# Altium PCB ebit_ad.PcbDoc (part 1 of 6)
Units mil, origin at the board's own origin, x right, y up, seen from the top; angles counter-clockwise.
Board outline 3958.82 x 3829.88 mil, 4 copper layers (Top Layer, MidLayer1, MidLayer2, Bottom Layer); 565 components, 392 nets, 1912 pads, 1242 vias.
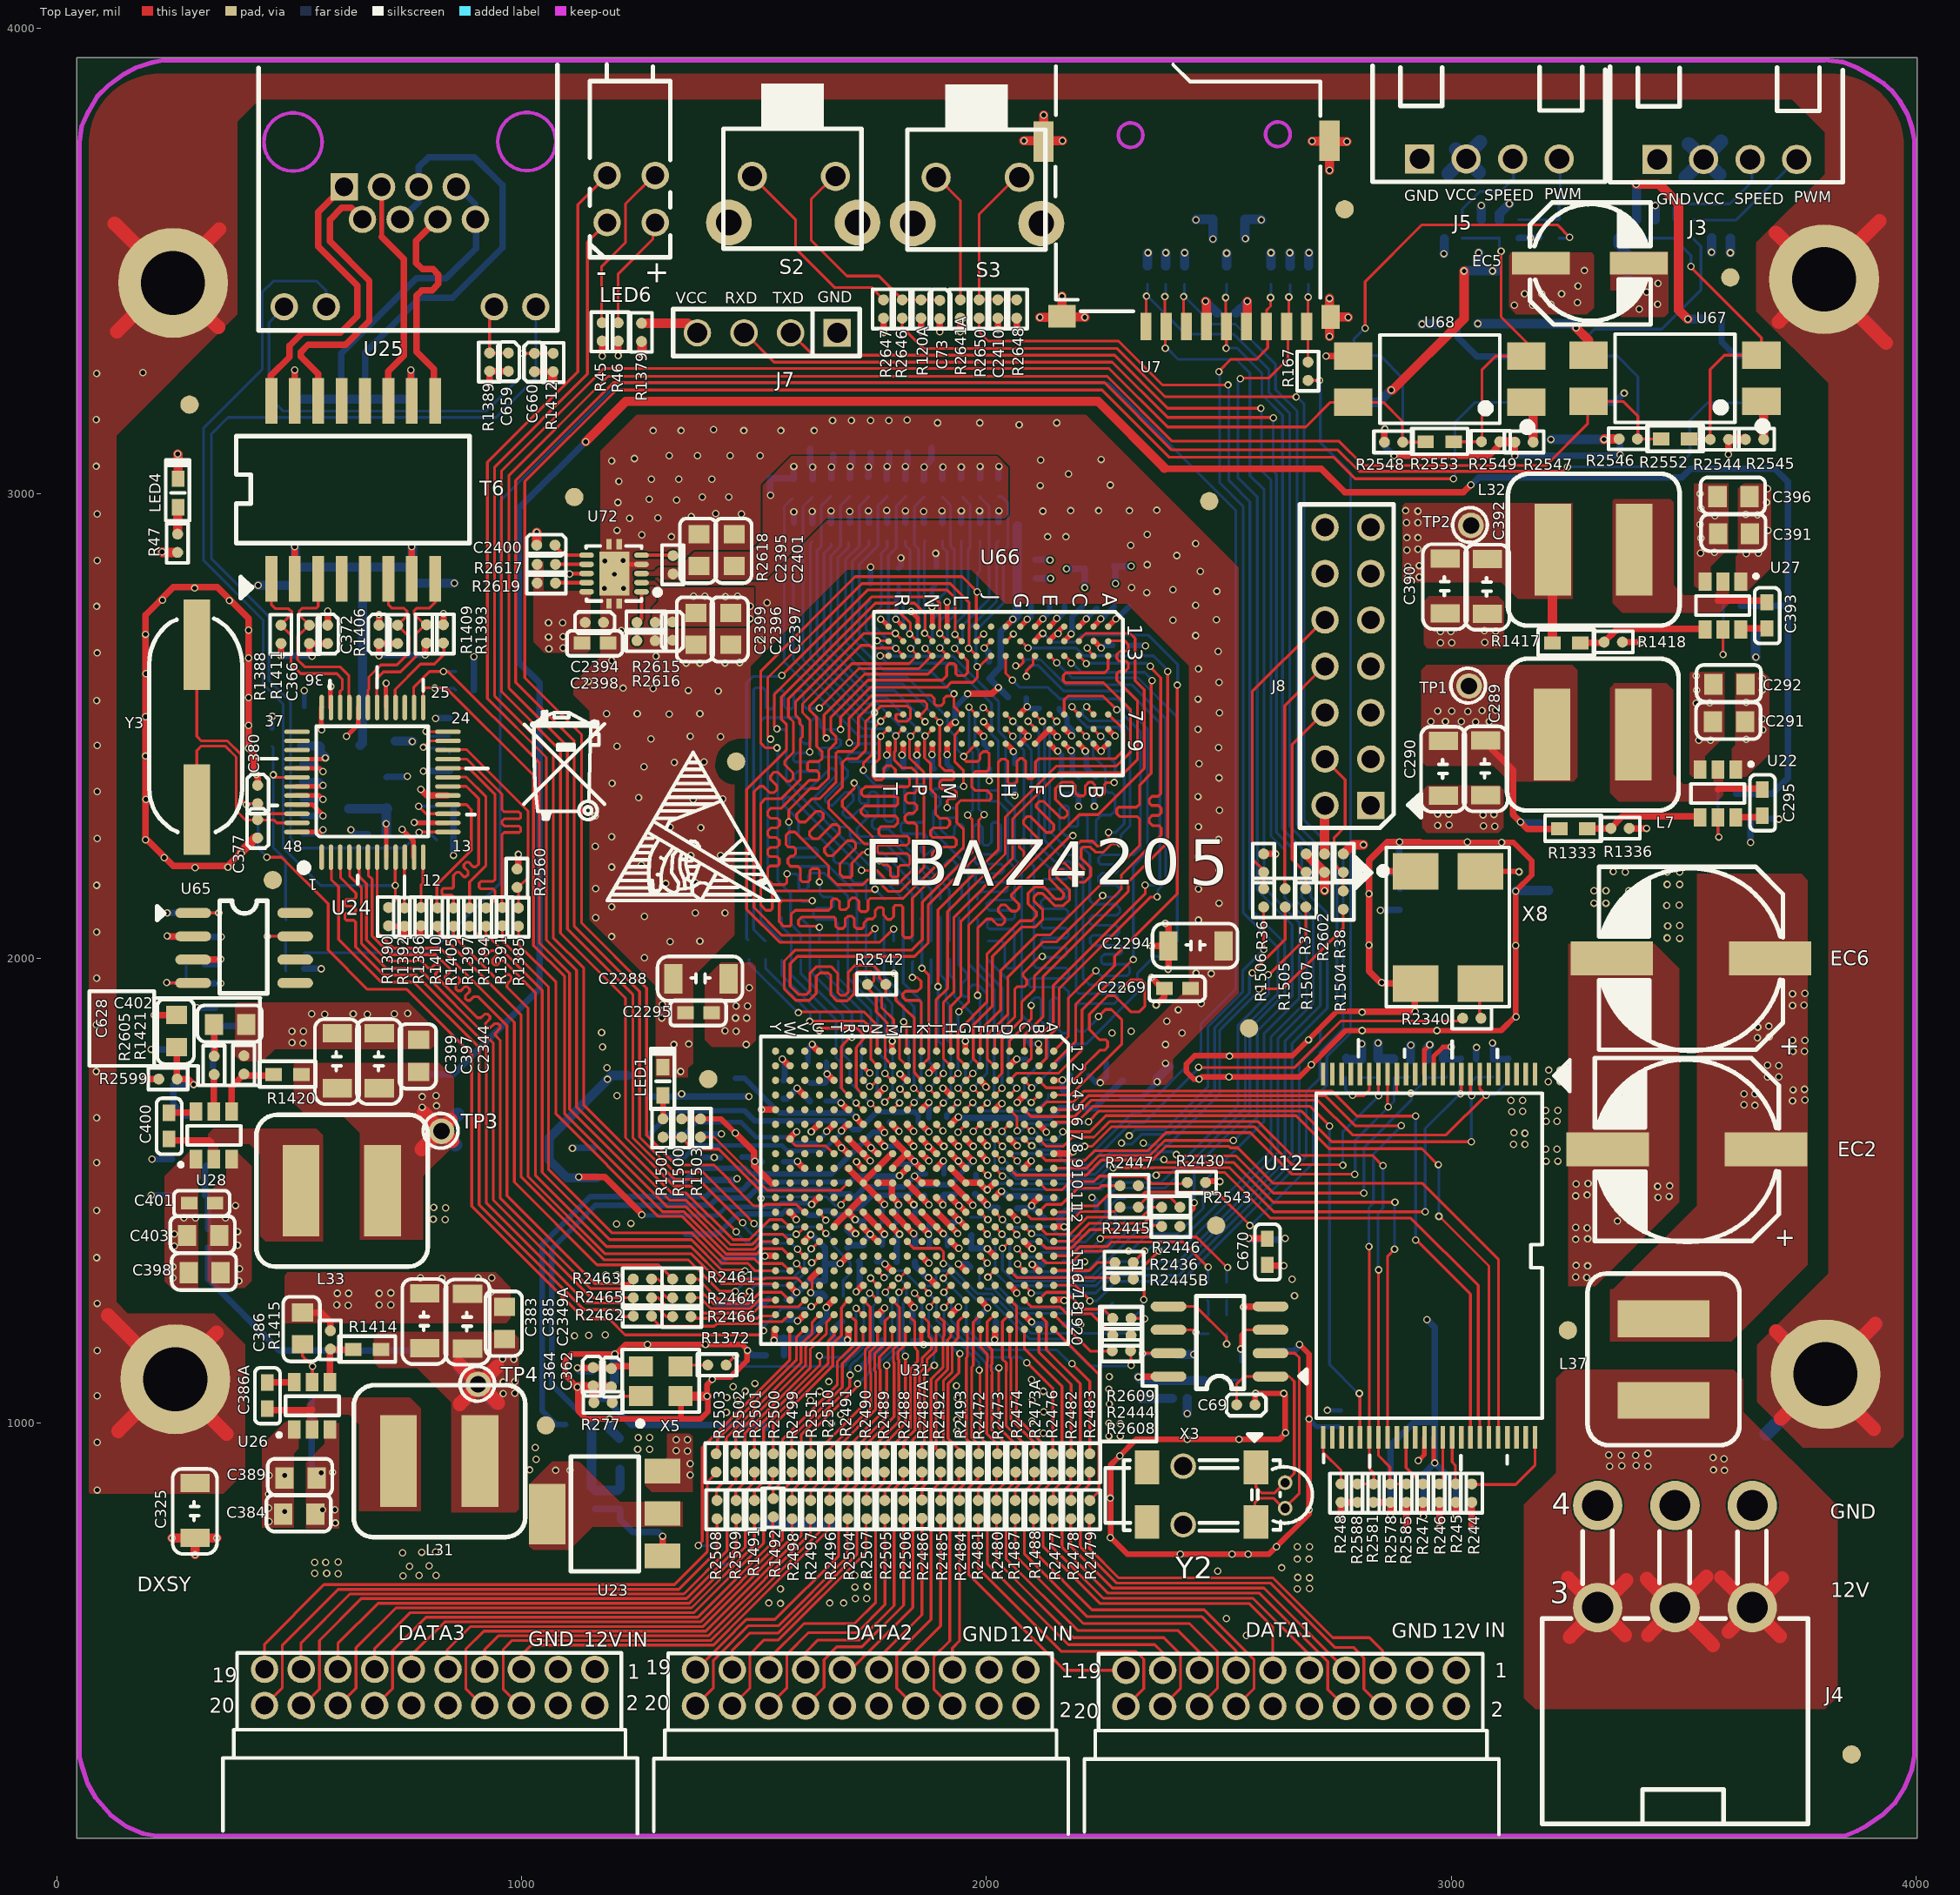
[diagram p0: Top Layer view]
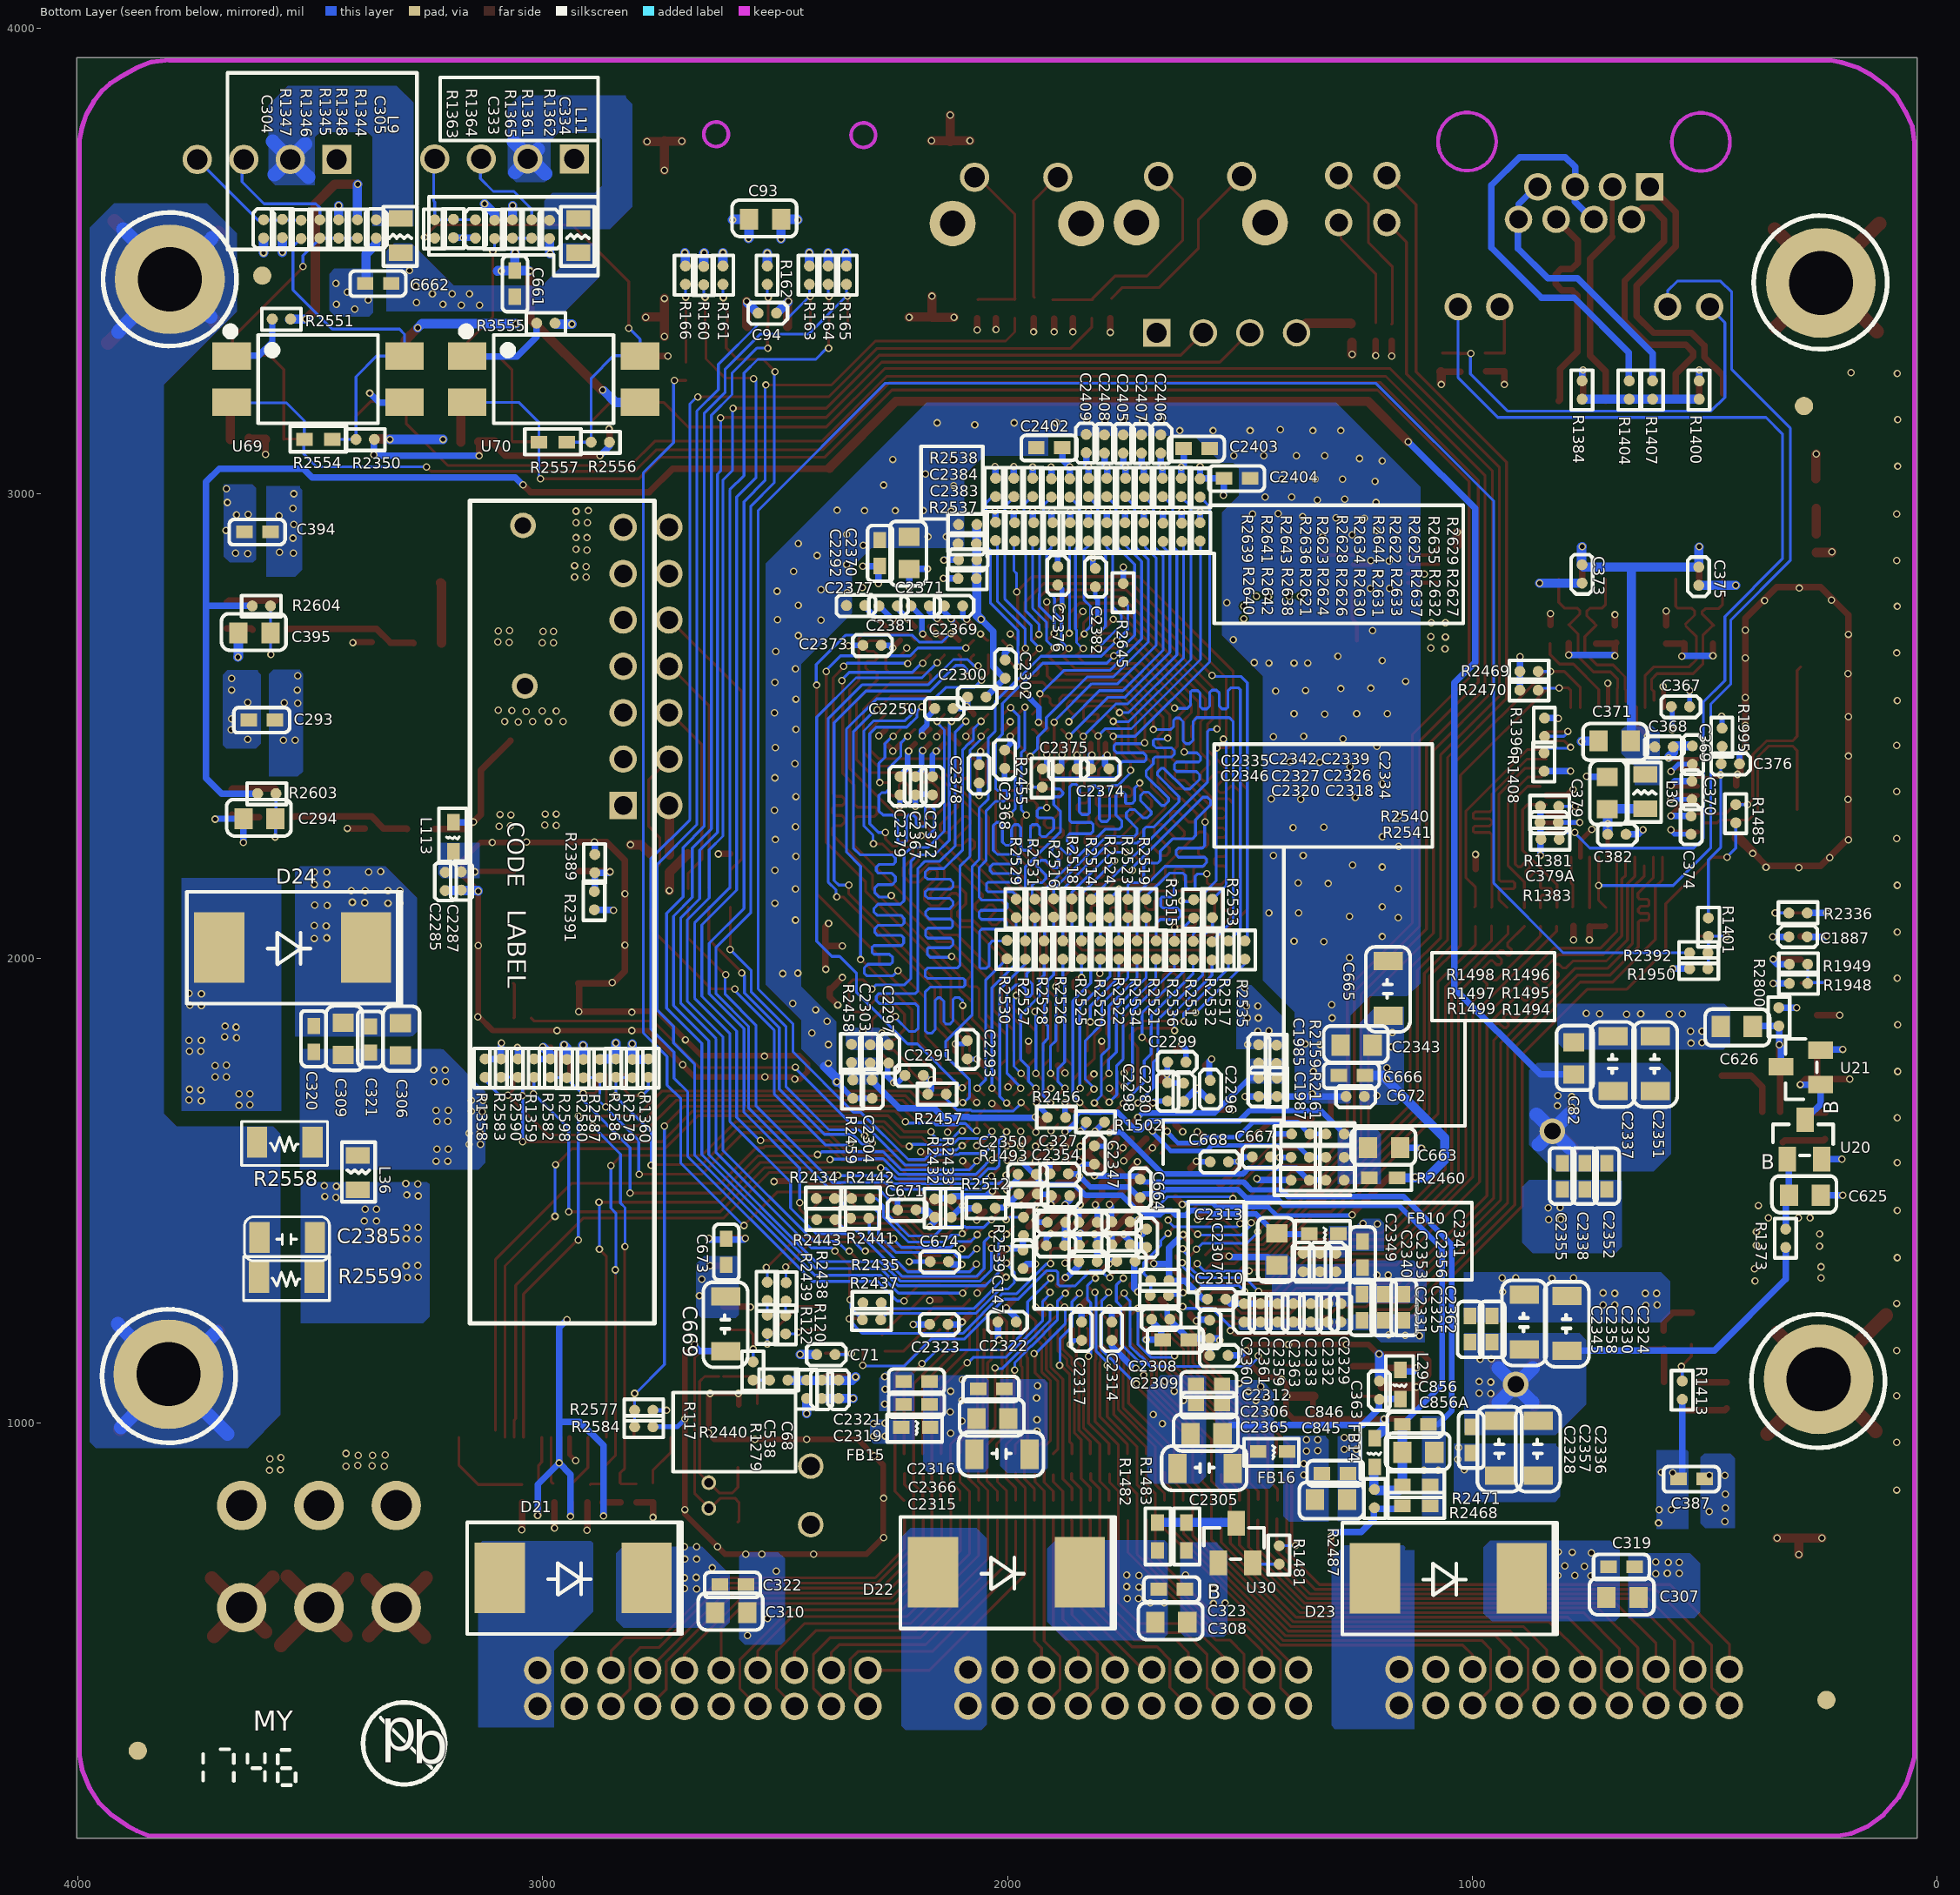
[diagram p1: Bottom Layer view, seen from below]
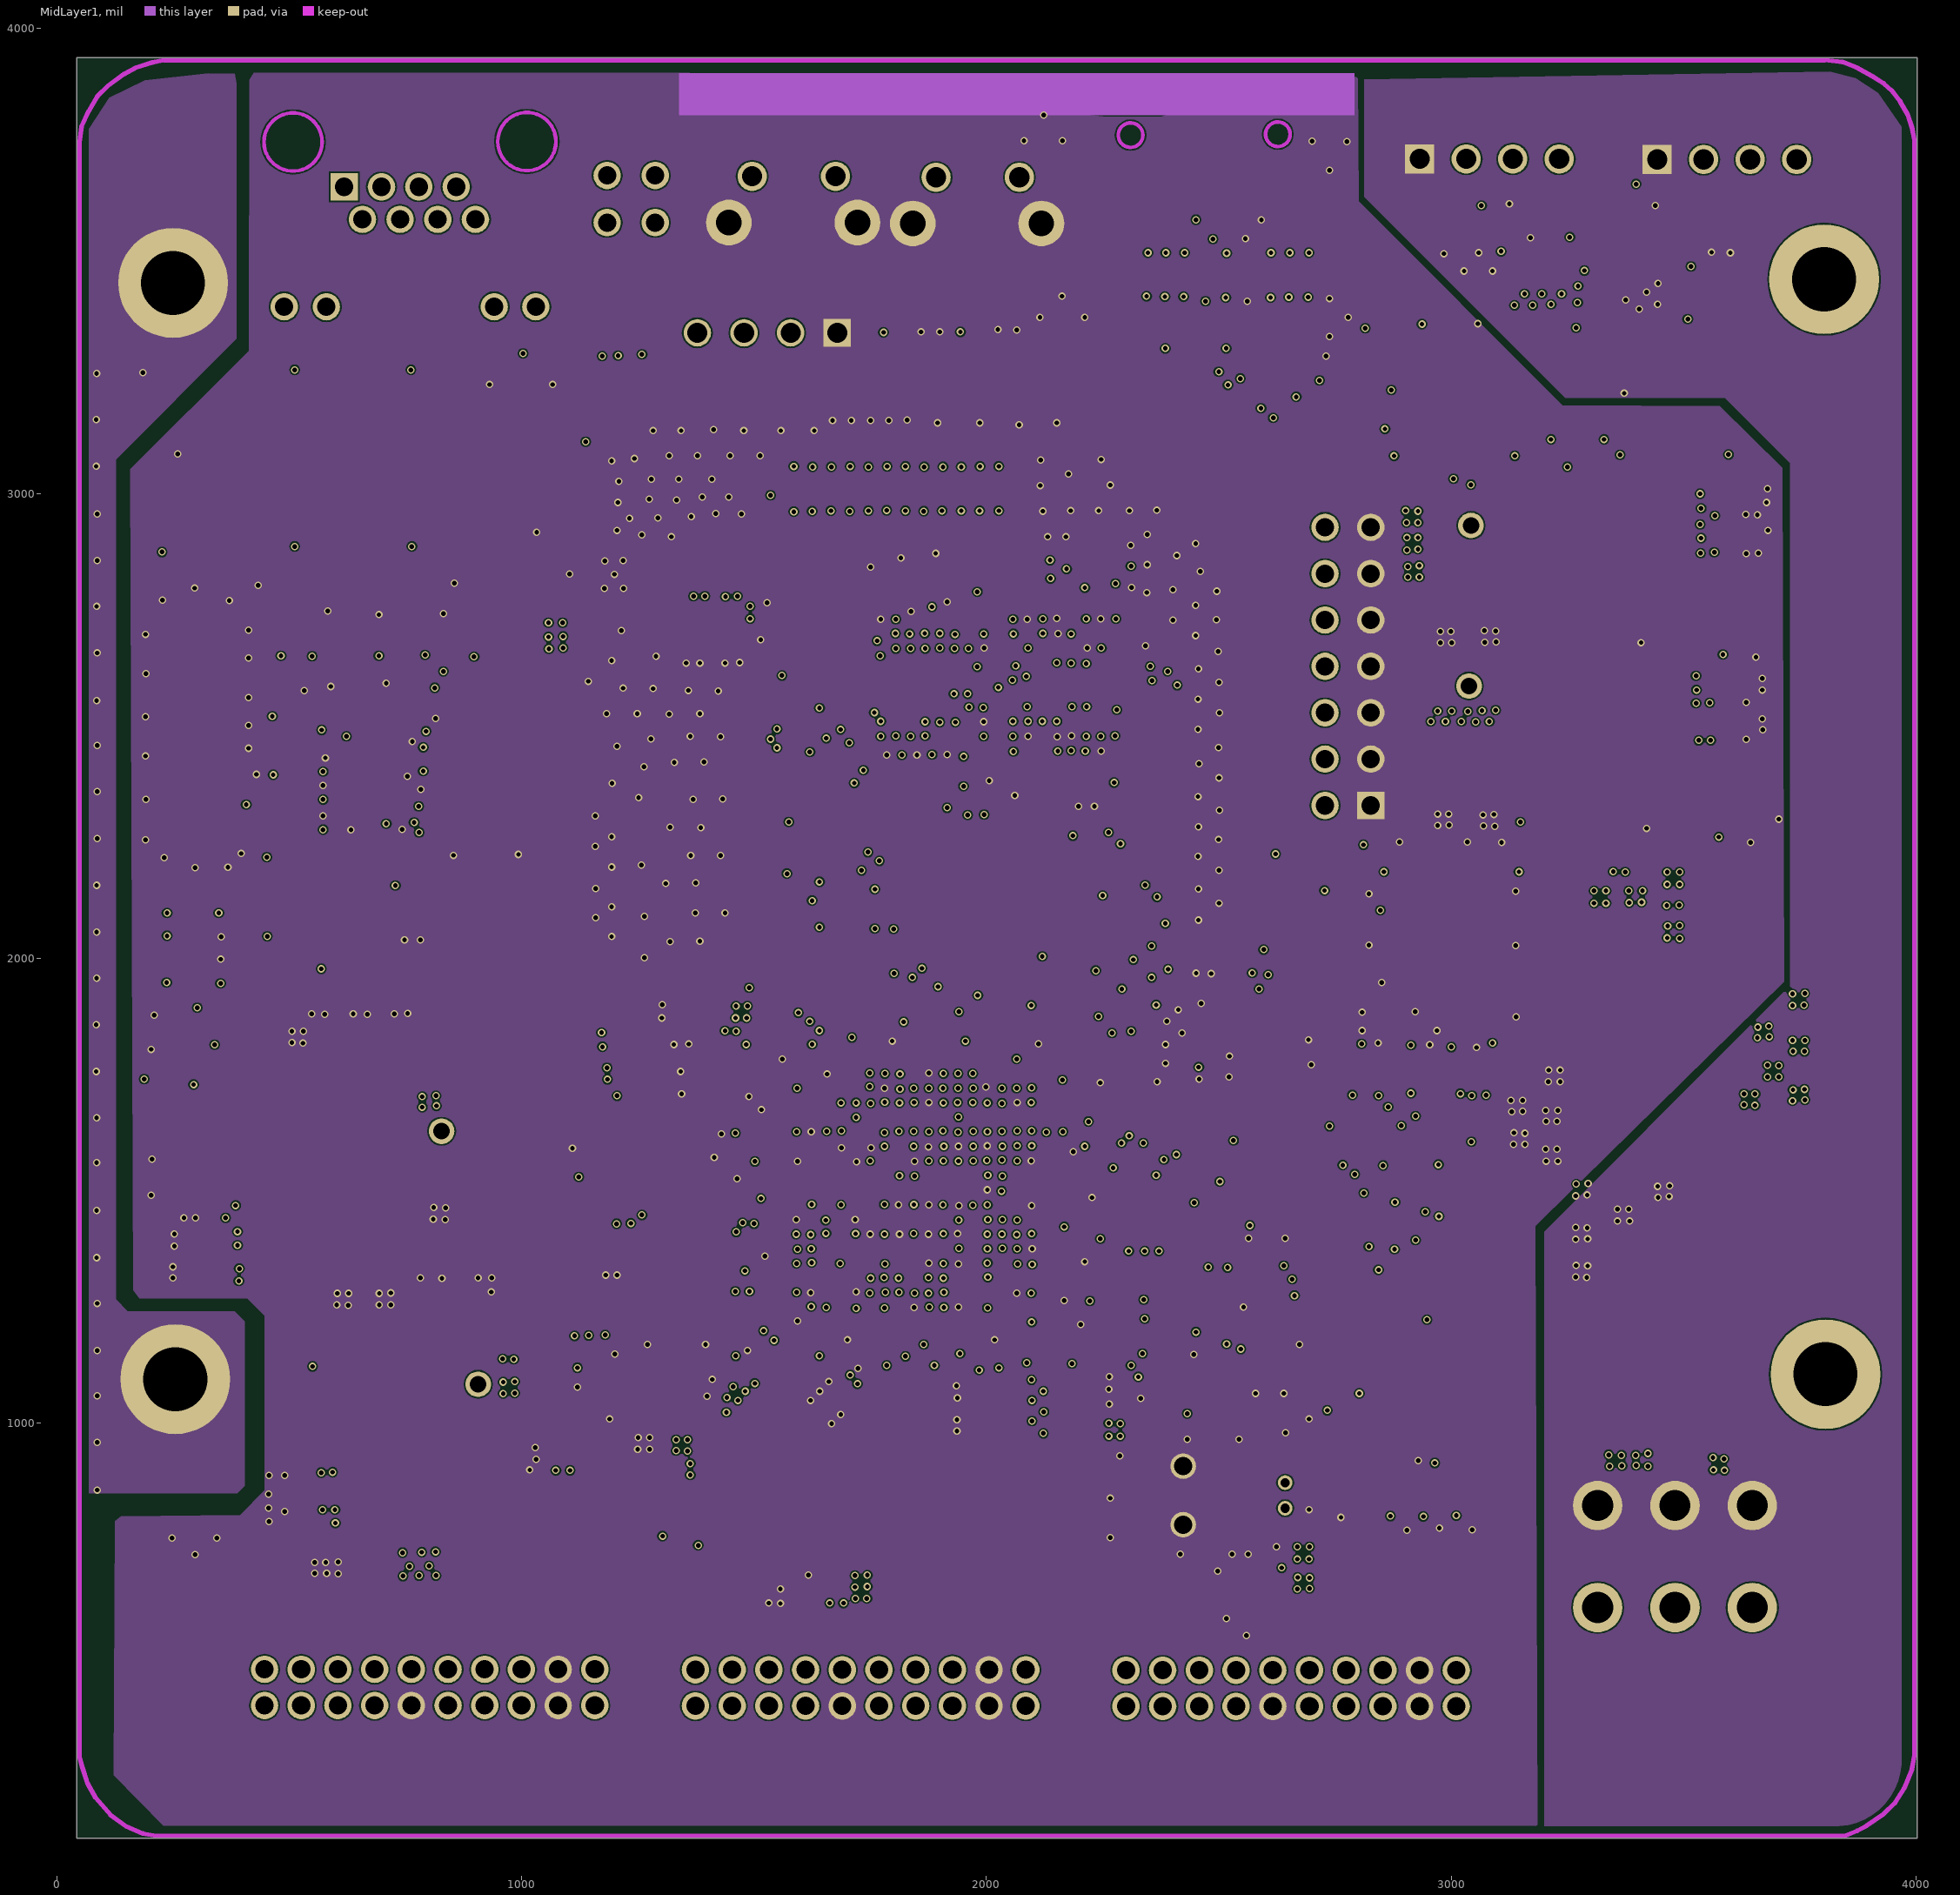
[diagram p2: MidLayer1]
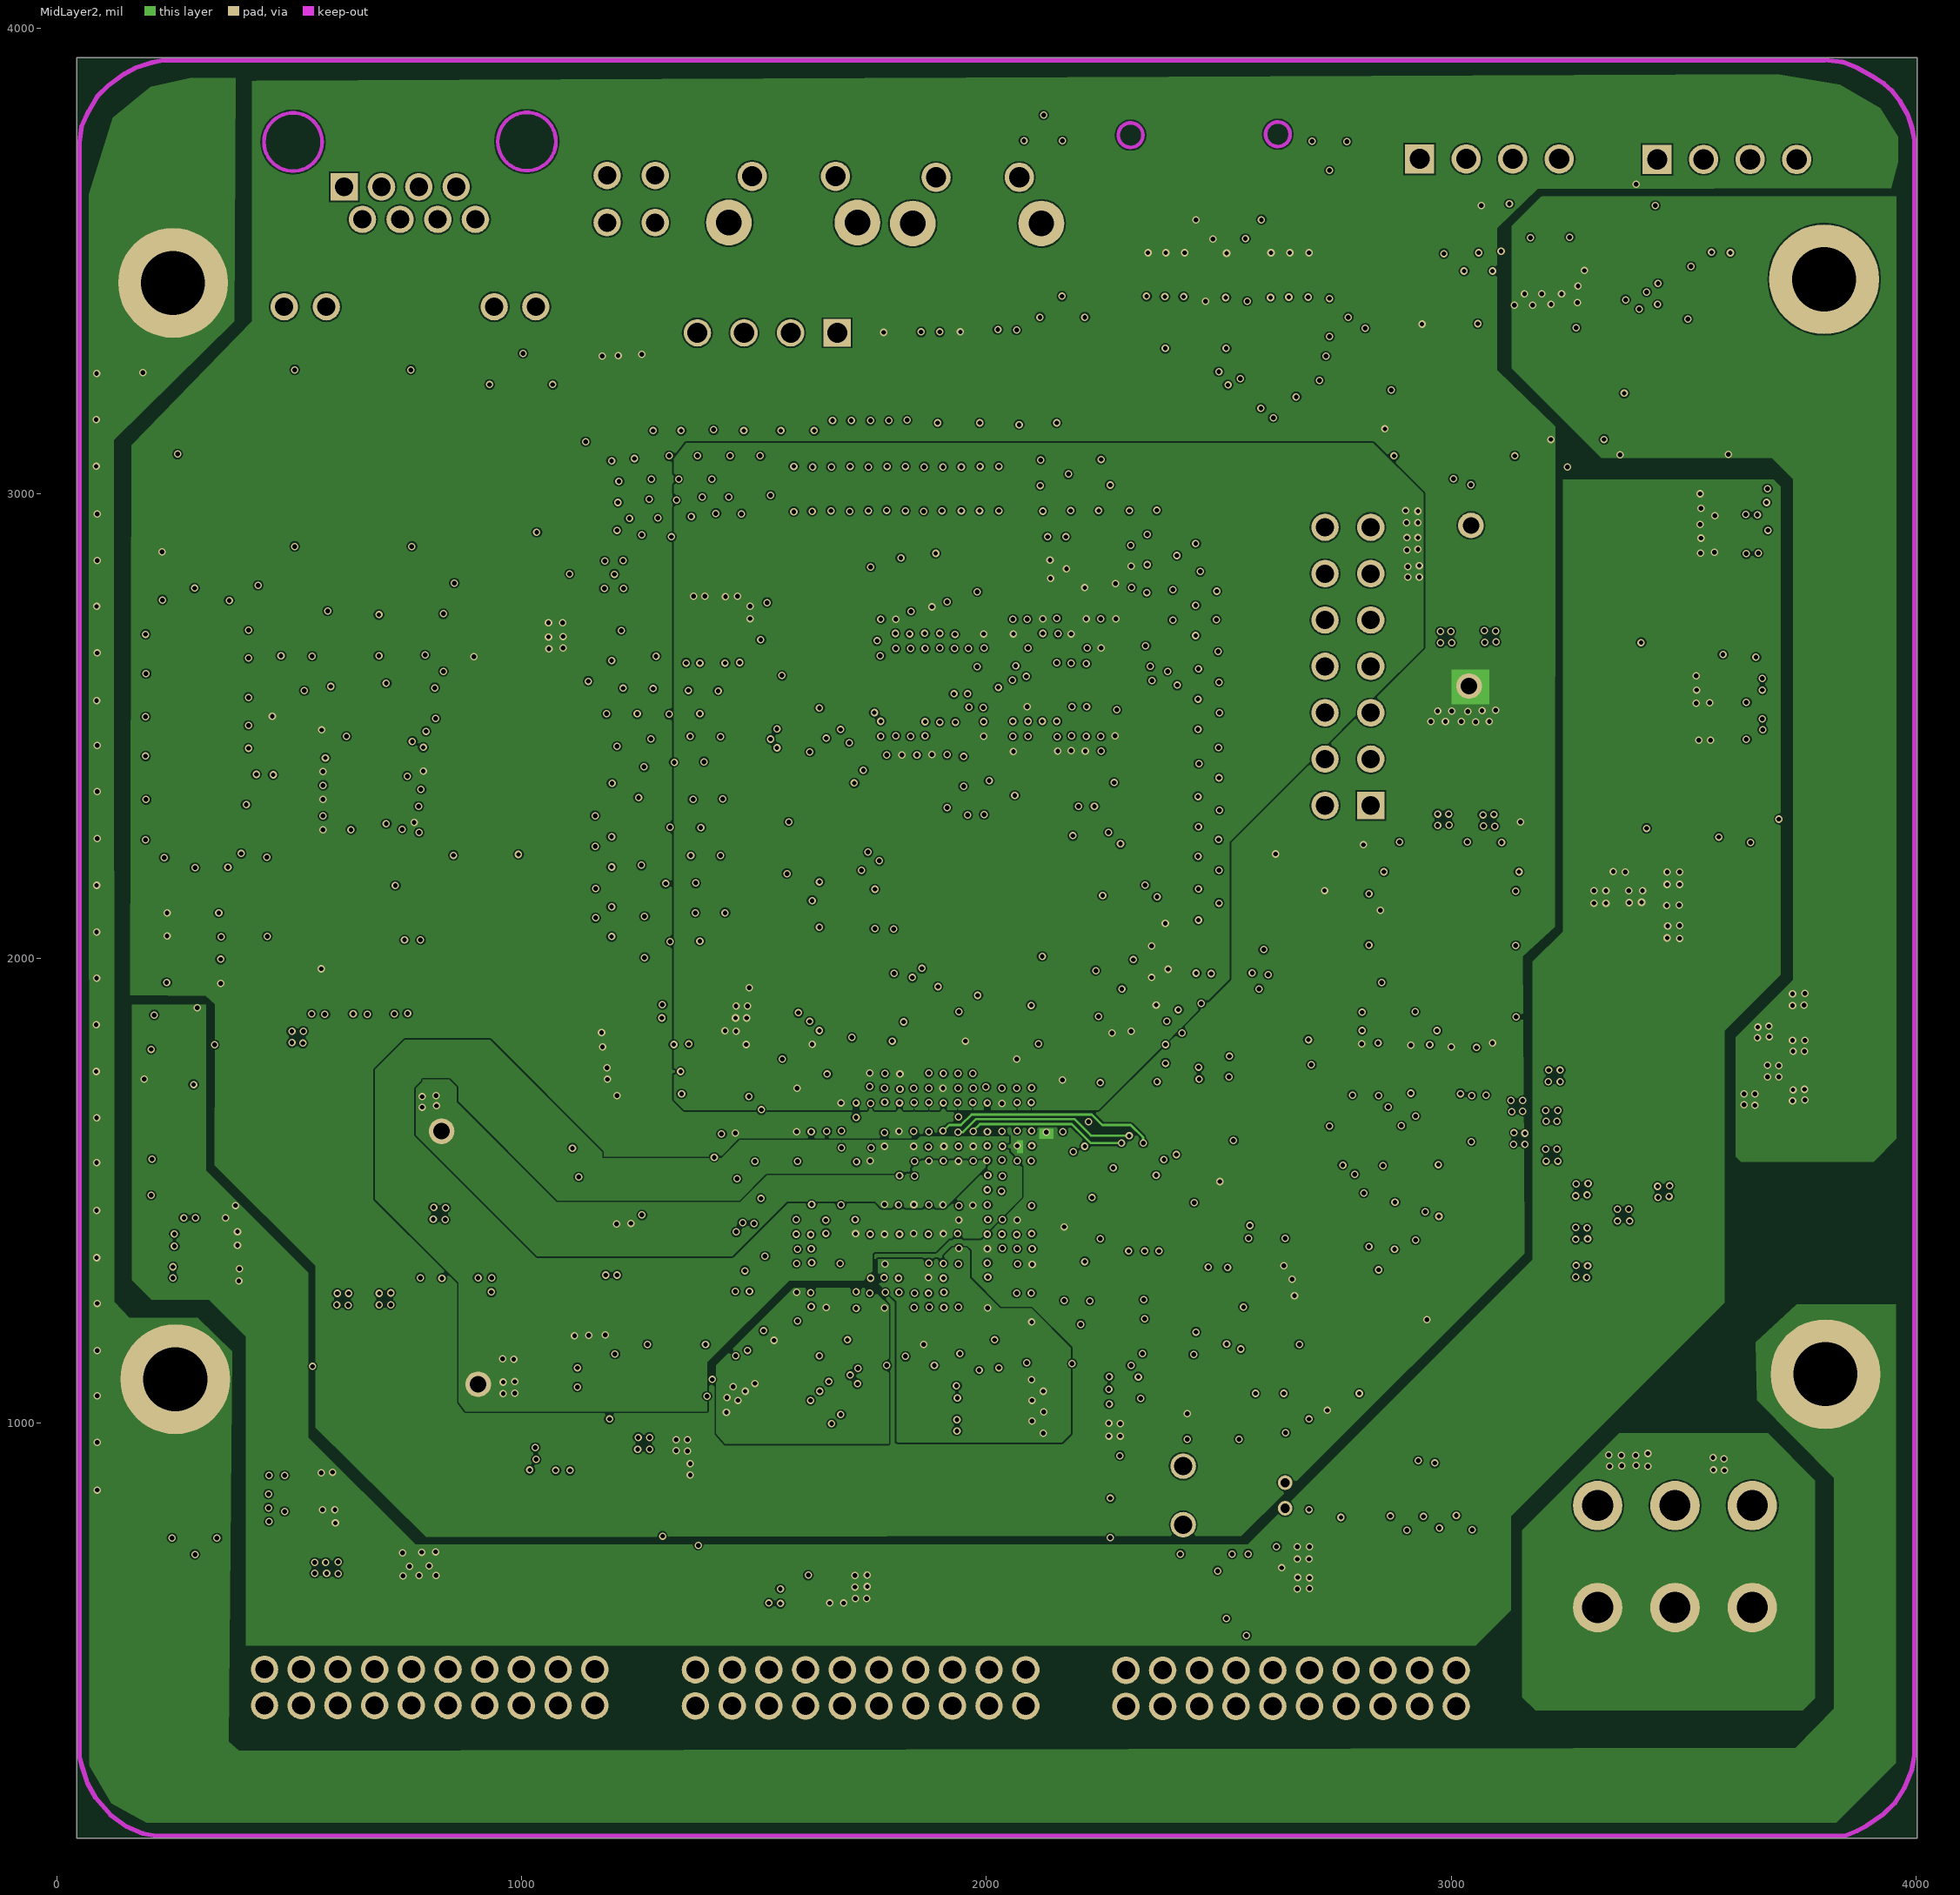
[diagram p3: MidLayer2]

## Layer stack, top to bottom
Top Solder: solder mask 0.4, Solder Resist, Dk 3.5
Top Layer: signal copper 1.4
Dielectric1: core 12.6, FR-4, Dk 4.8
MidLayer1: signal copper 1.4
Dielectric2: prepreg 12.6, FR-4, Dk 4.8
MidLayer2: signal copper 1.4
Dielectric3: core 12.6, FR-4, Dk 4.8
Bottom Layer: signal copper 1.4
Bottom Solder: solder mask 0.4, Solder Resist, Dk 3.5

## Board outline
43.23,107.2 4002.05,107.2 4002.05,3937.09 43.23,3937.09

## Design rules (kind name [scope] priority, off if disabled: settings)
Clearance [All] p1 off: gap=4 ignorepadtopadclearanceinfootprint=FALSE
Clearance Clearance_1 [All] p2: gap=3.2 ignorepadtopadclearanceinfootprint=FALSE
FabricationTestpoint [All] p1 off: side=3 testpointundercomponent=TRUE minsize=40 maxsize=100 preferedsize=60 minholesize=0 maxholesize=40 preferedholesize=32 testpointgrid=1 allowsidetop=TRUE allowsidebottom=TRUE usegrid=TRUE gridtolerance=0.01
PolygonConnect [All] p1: connectstyle=Direct reliefconductorwidth=30 reliefentries=4 polygonreliefangle="45 Angle" airgapwidth=10
RoutingLayers [All] p1: top layer_v5=FALSE mid layer 1_v5=FALSE mid layer 2_v5=FALSE bottom layer_v5=FALSE
RoutingVias [All] p1: holewidth=28 width=50 viastyle="Through Hole" minholewidth=1 minwidth=2 maxholewidth=500 maxwidth=500
SolderMaskExpansion [All] p1: expansion=4 istentingtop=FALSE
Width [All] p1: maxlimit=1000 minlimit=1 preferedwidth=10
28 further rules are at their usual default settings.

## Components (designator, comment, footprint, x,y, rotation, side; value= is the part's Value field where it differs from the comment)
C68 "NC" 3 2363.19,1092.52 r0 bottom
C69 "NC" 3 2538.39,1039.37 r270 top
C71 "NC" 3 2410.43,1147.64 r270 bottom
C73 "1UF" 3 1899.61,3375.98 r0 top
C82 "10UF" 2 781.5,1818.9 r270 bottom
C93 "NC" 2 2556.1,3589.57 r180 bottom
C94 "NC" 3 2536.42,3387.79 r270 bottom
C147 "10NF" 3 1966.54,1372.05 r0 bottom
C289 "22UF" 9 3073.82,2350.39 r90 top
C290 "22UF" 9 2983.27,2349.41 r90 top
C291 "10UF" 2 3562.99,2508.86 r0 top
C292 "10UF" 2 3563.98,2589.57 r0 top
C293 "100NF" 6 3631.89,2512.8 r180 bottom
C294 "NC" 2 3643.7,2300.2 r180 bottom
C295 "100NF" 6 3669.29,2307.09 r90 top
C304 "100NF" 3 3600.39,3549.21 r180 bottom
C305 "100NF" 3 3358.27,3549.21 r180 bottom
C306 "10UF" 2 3306.1,1860.24 r270 bottom
C307 "10UF" 2 711.61,625 r180 bottom
C308 "10UF" 2 1682.09,571.85 r180 bottom
C309 "10UF" 2 3429.13,1861.22 r270 bottom
C310 "10UF" 2 2628.94,592.52 r180 bottom
C319 "100NF" 6 706.69,690.94 r180 bottom
C320 "100NF" 6 3492.13,1854.33 r270 bottom
C321 "100NF" 6 3370.08,1853.35 r270 bottom
C322 "100NF" 6 2619.09,652.56 r180 bottom
C323 "100NF" 6 1674.21,642.72 r180 bottom
C325 "1NF" 9 297.24,752.95 r90 top
C327 "100NF" 3 1908.46,1536.42 r270 bottom
C333 "100NF" 3 3144.69,3549.21 r180 bottom
C334 "100NF" 3 2985.24,3548.23 r180 bottom
C362 "NC" 3 1193,1078.06 r0 top
C363 "NC" 3 1199.8,1090.55 r0 bottom
C364 "NC" 3 1153.74,1080.28 r0 top
C366 "NC" 3 582.68,2677.17 r0 top
C367 "100NF" 3 571.85,2541.34 r270 bottom
C368 "100NF" 3 607.28,2454.72 r270 bottom
C369 "100NF" 3 526.57,2417.32 r180 bottom
C370 "100NF" 3 527.56,2341.54 r180 bottom
C371 "NC" 2 659.45,2467.52 r0 bottom
C372 "NC" 3 692.91,2677.17 r0 top
C373 "100NF" 3 763.78,2846.46 r0 bottom
C374 "100NF" 3 529.53,2266.73 r180 bottom
C375 "100NF" 3 512.8,2841.54 r0 bottom
C376 "100NF" 3 464.57,2418.31 r270 bottom
C377 "22PF" 3 432.09,2258.86 r0 top
C379 "NC" 2 709.65,2389.76 r270 bottom
C379A "100NF" 3 854.33,2292.32 r270 bottom
C380 "22PF" 3 432.09,2332.68 r0 top
C382 "100NF" 3 708.66,2266.73 r270 bottom
C383 "22UF" 9 791.34,1161.42 r90 top
C384 "10UF" 2 487.2,804.13 r0 top
C385 "22UF" 9 883.86,1160.43 r90 top
C386 "NC" 2 528.54,1169.29 r90 top
C386A "100NF" 6 452.76,1031.5 r90 top
C387 "100NF" 6 556.1,879.92 r180 bottom
C389 "10UF" 2 490.16,881.89 r0 top
C390 "22UF" 9 2987.2,2742.13 r90 top
C391 "10UF" 2 3573.82,2913.39 r0 top
C392 "22UF" 9 3077.76,2741.14 r90 top
C393 "100NF" 6 3679.13,2709.65 r90 top
C394 "100NF" 6 3641.73,2917.32 r180 bottom
C395 "NC" 2 3654.53,2699.8 r180 bottom
C396 "10UF" 2 3572.83,2993.11 r0 top
C397 "22UF" 9 693.9,1720.47 r90 top
C398 "10UF" 2 283.46,1323.82 r0 top
C399 "22UF" 9 603.35,1720.47 r90 top
C400 "100NF" 6 241.14,1611.22 r90 top
C401 "100NF" 6 284.45,1473.42 r0 top
C402 "NC" 2 338.58,1857.28 r0 top
C403 "10UF" 2 280.51,1403.54 r0 top
C538 "NC" 3 2399.61,1092.52 r0 bottom
C625 "10UF" 2 318.9,1490.16 r180 bottom
C626 "10UF" 2 396.65,1853.35 r0 bottom
C628 "NC" 2 257.87,1809.05 r90 top
C659 "100NF" 3 971.46,3262.79 r0 top
C660 "100NF" 3 1027.56,3261.81 r0 top
C661 "100NF" 6 3060.04,3423.23 r90 bottom
C662 "100NF" 6 3381.89,3451.77 r180 bottom
C663 "33UF" 2 1224.41,1592.52 r180 bottom
C664 "100NF" 3 1714.57,1485.24 r180 bottom
C665 "51UF" 9 1181.1,1875.98 r90 bottom
C666 "3.9UF" 6 1287.4,1748.03 r180 bottom
C667 "470NF" 3 1473.43,1572.83 r270 bottom
C668 "470NF" 3 1563.98,1562.01 r270 bottom
C669 "51UF" 9 2606.3,1154.53 r90 bottom
C670 "3.9UF" 6 2604.33,1340.55 r90 top
C671 "470NF" 3 2236.22,1458.66 r270 bottom
C672 "470NF" 3 1271.65,1702.76 r270 bottom
C673 "3.9UF" 6 2605.32,1340.55 r90 bottom
C674 "470NF" 3 2166.34,1347.44 r270 bottom
C845 "NC" 2 1269.69,835.63 r0 bottom
C846 "NC" 6 1267.72,891.73 r0 bottom
C856 "NC" 6 1150.59,997.05 r180 bottom
C856A "NC" 2 1150.59,937.01 r180 bottom
C1887 "100NF" 3 279.53,2046.26 r90 bottom
C1985 "100NF" 3 1459.65,1774.61 r180 bottom
C1987 "100NF" 3 1459.65,1702.76 r180 bottom
C2250 "470NF" 3 2156.5,2537.4 r270 bottom
C2269 "3.9UF" 6 2382.87,1935.04 r0 top
C2280 "10NF" 3 1621.06,1691.93 r180 bottom
C2285 "100PF" 3 3209.65,2145.67 r180 bottom
C2287 "100PF" 3 3175.2,2146.65 r180 bottom
C2288 "51UF" 9 1326.77,1955.71 r0 top
C2291 "470NF" 3 2220.47,1748.03 r270 bottom
C2292 "3.9UF" 6 2274.61,2843.5 r90 bottom
C2293 "470NF" 3 2086.61,1783.46 r180 bottom
C2294 "51UF" 9 2391.73,2026.57 r0 top
C2295 "3.9UF" 6 1352.36,1882.87 r0 top
C2296 "470NF" 3 1563.98,1697.83 r180 bottom
C2297 "470NF" 3 2255.91,1774.61 r180 bottom
C2298 "470NF" 3 1655.51,1692.91 r180 bottom
C2299 "470NF" 3 1655.51,1776.57 r270 bottom
C2300 "100PF" 3 2085.63,2562.01 r270 bottom
C2302 "100PF" 3 2004.92,2602.36 r180 bottom
C2303 "100NF" 3 2295.28,1774.61 r180 bottom
C2304 "100NF" 3 2291.34,1698.82 r180 bottom
C2305 "51UF" 9 1633.86,902.56 r180 bottom
C2306 "3.9UF" 6 1594.49,1039.37 r180 bottom
C2307 "470NF" 3 1564.96,1182.09 r180 bottom
C2308 "470NF" 3 1689.96,1223.42 r270 bottom
C2309 "3.9UF" 6 1666.34,1179.13 r180 bottom
C2310 "470NF" 3 1564.96,1145.67 r270 bottom
C2312 "3.9UF" 6 1594.49,1083.66 r180 bottom
C2313 "470NF" 3 1569.88,1266.73 r270 bottom
C2314 "470NF" 3 1775.59,1217.52 r0 bottom
C2315 "51UF" 9 2070.87,933.07 r180 bottom
C2316 "3.9UF" 6 2062.99,1073.82 r180 bottom
C2317 "470NF" 3 1840.55,1217.52 r0 bottom
C2318 "470NF" 3 1764.76,1348.42 r270 bottom
C2319 "3.9UF" 6 2223.43,1040.35 r180 bottom
C2320 "470NF" 3 1846.46,1347.44 r270 bottom
C2321 "3.9UF" 6 2223.43,1089.57 r180 bottom
C2322 "470NF" 3 2020.67,1217.52 r270 bottom
C2323 "470NF" 3 2167.32,1212.6 r270 bottom
C2324 "3.9UF" 6 957.68,1174.21 r90 bottom
C2325 "3.9UF" 6 1190.95,1221.46 r90 bottom
C2326 "470NF" 3 1775.59,1383.86 r270 bottom
C2327 "470NF" 3 1845.47,1382.87 r270 bottom
C2328 "3.9UF" 6 1002.95,936.02 r90 bottom
C2329 "470NF" 3 1282.48,1256.89 r0 bottom
C2330 "3.9UF" 6 1004.92,1174.21 r90 bottom
C2331 "3.9UF" 6 1237.2,1221.46 r90 bottom
C2332 "470NF" 3 1311.02,1256.89 r0 bottom
C2333 "470NF" 3 1347.44,1256.89 r0 bottom
C2334 "470NF" 3 1700.79,1377.95 r180 bottom
C2335 "470NF" 3 1914.37,1432.09 r270 bottom
C2336 "51UF" 9 858.27,886.81 r90 bottom
C2337 "51UF" 9 696.85,1714.57 r90 bottom
C2338 "3.9UF" 6 757.87,1559.06 r270 bottom
C2339 "470NF" 3 1775.59,1433.07 r270 bottom
C2340 "470NF" 3 1364.17,1325.79 r180 bottom
C2341 "3.9UF" 6 1236.22,1334.65 r90 bottom
C2342 "470NF" 3 1846.46,1432.09 r270 bottom
C2343 "33UF" 2 1283.46,1812.99 r180 bottom
C2344 "33UF" 2 778.54,1755.91 r90 top
C2345 "51UF" 9 887.8,1158.46 r90 bottom
C2346 "470NF" 3 1916.34,1381.89 r270 bottom
C2347 "470NF" 3 1812.99,1557.09 r180 bottom
C2349 "10UF" 2 1420.28,1339.57 r90 bottom
C2349A "33UF" 2 963.58,1181.1 r90 top
C2350 "RES1" 3 1977.36,1535.43 r270 bottom
C2351 "51UF" 9 606.3,1714.57 r90 bottom
C2352 "3.9UF" 6 710.63,1559.06 r270 bottom
C2353 "470NF" 3 1327.76,1325.79 r180 bottom
C2354 "470NF" 3 1905.51,1489.17 r270 bottom
C2355 "3.9UF" 6 806.1,1559.06 r270 bottom
C2356 "470NF" 3 1293.31,1325.79 r180 bottom
C2357 "51UF" 9 940.95,886.81 r90 bottom
C2358 "51UF" 9 796.26,1155.51 r90 bottom
C2359 "470NF" 3 1419.29,1256.89 r0 bottom
C2360 "470NF" 3 1491.14,1256.89 r0 bottom
C2361 "470NF" 3 1455.71,1256.89 r0 bottom
C2362 "3.9UF" 6 1147.64,1221.46 r90 bottom
C2363 "470NF" 3 1384.84,1256.89 r0 bottom
C2365 "33UF" 2 1606.3,977.36 r180 bottom
C2366 "33UF" 2 2066.93,1009.84 r180 bottom
C2367 "10NF" 3 2197.83,2390.75 r0 bottom
C2368 "10NF" 3 2005.91,2447.83 r0 bottom
C2369 "10NF" 3 2135.83,2757.87 r270 bottom
C2370 "10UF" 2 2211.61,2837.6 r90 bottom
C2371 "10NF" 3 2207.68,2757.87 r270 bottom
C2372 "10NF" 3 2161.42,2390.75 r0 bottom
C2373 "10NF" 3 2311.02,2673.23 r270 bottom
C2374 "10NF" 3 1820.87,2407.48 r270 bottom
C2375 "10NF" 3 1889.76,2407.48 r270 bottom
C2376 "10NF" 3 1891.73,2803.15 r180 bottom
C2377 "10NF" 3 2346.46,2758.86 r270 bottom
C2378 "10NF" 3 2061.02,2416.34 r0 bottom
C2379 "10NF" 3 2231.3,2390.75 r0 bottom
C2381 "10NF" 3 2276.58,2757.87 r270 bottom
C2382 "10NF" 3 1811.02,2799.21 r180 bottom
C2383 "100NF" 3 2105.32,2857.28 r270 bottom
C2384 "100NF" 3 2106.3,2891.73 r270 bottom
C2385 "1NF" 44 3609.25,1399.61 r180 bottom
C2394 "100NF" 3 1136.81,2722.44 r270 top
C2395 "NC" 2 1381.89,2843.5 r90 top
C2396 "NC" 2 1375,2674.21 r90 top
C2397 "NC" 2 1449.8,2674.21 r90 top
C2398 "3.9UF" 6 1129.92,2678.15 r0 top
C2399 "NC" 3 1324.8,2723.42 r180 top
C2400 "NC" 3 1032.48,2888.78 r270 top
C2401 "NC" 2 1457.68,2843.5 r90 top
C2402 "NC" 6 1937.99,3098.42 r180 bottom
C2403 "NC" 6 1621.06,3096.46 r180 bottom
C2404 "NC" 6 1534.45,3032.48 r180 bottom
C2405 "NC" 3 1750.98,3086.61 r180 bottom
C2406 "NC" 3 1670.28,3086.61 r180 bottom
C2407 "NC" 3 1711.61,3086.61 r180 bottom
C2408 "NC" 3 1791.34,3086.61 r180 bottom
C2409 "NC" 3 1830.71,3087.6 r180 bottom
C2410 "1UF" 1 2024.61,3376.97 r90 top
D21 "SS810" 42 3092.52,667.32 r180 bottom
D22 "SS810" 42 2160.43,679.13 r180 bottom
D23 "SS810" 42 1209.65,666.34 r180 bottom
D24 "NC" 42 3695.87,2023.62 r180 bottom
DATA1 "2*10PIN-2.0MM" 37 3010.83,468.5 r0 top
DATA2 "2*10PIN-2.0MM" 37 2084.65,469.49 r0 top
DATA3 "2*10PIN-2.0MM" 37 1157.48,470.47 r0 top
EC2 "470UF/16V" 24 3677.17,1588.58 r0 top
EC5 "100UF/16V" 29 3192.91,3495.08 r0 top
EC6 "470UF/16V" 24 3686.02,2000 r0 top
FB10 "1.2UH" 40 1350.39,1407.48 r90 bottom
FB14 "1.2UH" 40 1209.65,967.52 r180 bottom
FB15 "1.2UH" 40 2228.35,991.14 r90 bottom
FB16 "1.2UH" 40 1460.63,938.98 r90 bottom
J3 "4PIN-2.54MM" 31 3442.91,3718.5 r0 top
J4 "2*3PIN-4.2MM" 38 3647.64,603.35 r0 top
J5 "4PIN-2.54MM" 31 2932.09,3719.49 r0 top
J7 "NC" 33 1679.13,3345.47 r0 top
J8 "NC" 36 2826.77,2328.74 r0 top
L7 "4.7UH" 21 3216.54,2481.3 r0 top
L9 "0.33UH" 39 3305.12,3591.54 r180 bottom
L11 "0.33UH" 39 2923.23,3591.54 r180 bottom
L29 "NC" 40 1154.53,1114.17 r180 bottom
L30 "NC" 39 627.95,2395.67 r180 bottom
L31 "4.7UH" 21 735.24,918.31 r0 top
L32 "4.7UH" 21 3218.5,2878.94 r0 top
L33 "4.7UH" 21 525.59,1500 r0 top
L36 "0.33UH" 39 3397.64,1501.97 r0 bottom
L37 "4.7UH" 21 3456.69,1049.21 r90 top
L113 "1.2UH" 40 3191.93,2292.32 r180 bottom
LED1 "G" 8 1304.13,1765.75 r0 top
LED4 "G" 8 260.83,3031.5 r0 top
LED6 "R+G" 34 1287.4,3582.68 r0 top
R36 "4.7K 1%" 1 2596.46,2185.04 r90 top
R37 "22R 1%" 1 2687.01,2110.24 r90 top
R38 "4.7K 1%" 1 2767.72,2185.04 r90 top
R45 "150R 1%" 1 1173.23,3327.76 r90 top
R46 "150R 1%" 1 1207.68,3327.76 r90 top
R47 "150R 1%" 1 259.84,2873.03 r90 top
R117 "NC" 1 2547.24,1092.52 r90 bottom
R120 "NC" 1 2477.36,1191.93 r90 bottom
R120A "10K 1%" 1 1859.25,3376.97 r90 top
R122 "NC" 1 2516.73,1192.91 r90 bottom
R160 "NC" 1 2653.54,3448.82 r90 bottom
R161 "NC" 1 2612.2,3449.8 r90 bottom
R162 "NC" 1 2516.73,3449.8 r90 bottom
R163 "NC" 1 2426.18,3449.8 r90 bottom
R164 "NC" 1 2385.83,3449.8 r90 bottom
R165 "NC" 1 2346.46,3449.8 r90 bottom
R166 "10K 1%" 1 2692.91,3449.8 r90 bottom
R167 "0R 1%" 1 2691.93,3243.11 r90 top
R244 "NC" 1 3044.29,829.72 r90 top
R245 "NC" 1 3009.84,829.72 r90 top
R246 "0R 1%" 1 2974.41,829.72 r90 top
R247 "NC" 1 2938.98,829.72 r90 top
R248 "NC" 1 2762.8,829.72 r90 top
R277 "NC" 1 1155.51,1044.29 r0 top
R1279 "NC" 1 2432.09,1053.15 r90 bottom
R1333 "51K 5%" 7 3232.28,2278.54 r0 top
R1336 "11.3K 1%" 1 3343.5,2279.53 r0 top
R1344 "10K 1%" 1 3398.62,3549.21 r90 bottom
R1345 "33R 1%" 1 3479.33,3549.21 r90 bottom
R1346 "33R 1%" 1 3519.69,3548.23 r90 bottom
R1347 "NC" 1 3560.04,3550.2 r90 bottom
R1348 "NC" 1 3438.98,3549.21 r90 bottom
R1358 "4.7K 1%" 1 3124.02,1744.09 r90 bottom
R1359 "4.7K 1%" 1 3018.7,1744.09 r90 bottom
R1360 "4.7K 1%" 1 2772.64,1744.09 r90 bottom
R1361 "10K 1%" 1 3064.96,3549.21 r90 bottom
R1362 "33R 1%" 1 3023.62,3549.21 r90 bottom
R1363 "33R 1%" 1 3232.28,3549.21 r90 bottom
R1364 "NC" 1 3191.93,3550.2 r90 bottom
R1365 "NC" 1 3103.35,3548.23 r90 bottom
R1372 "NC" 1 1400.59,1125 r0 top
R1373 "33R 1%" 1 325.79,1377.95 r90 bottom
R1379 "33R 1%" 1 1257.87,3326.77 r90 top
R1381 "5.1K 1%" 1 853.35,2326.77 r180 bottom
R1383 "5.1K 1%" 1 852.36,2255.91 r180 bottom
R1384 "75R 1%" 1 763.78,3202.76 r90 bottom
R1385 "22R 1%" 1 993.11,2068.9 r90 top
R1386 "5.1K 1%" 1 783.46,2069.88 r90 top
R1388 "NC" 1 482.28,2677.17 r90 top
R1389 "330R 1%" 1 931.1,3262.79 r90 top
R1390 "5.1K 1%" 1 713.58,2069.88 r90 top
R1391 "22R 1%" 1 958.66,2069.88 r90 top
R1392 "5.1K 1%" 1 748.03,2068.9 r90 top
R1393 "6.2K 1%" 1 831.69,2678.15 r90 top
R1394 "22R 1%" 1 923.23,2068.9 r90 top
R1396 "5.1K 1%" 1 844.49,2477.36 r90 bottom
R1397 "22R 1%" 1 887.8,2068.9 r90 top
R1400 "75R 1%" 1 511.81,3202.76 r90 bottom
R1401 "33R 1%" 1 492.13,2086.61 r270 bottom
R1404 "75R 1%" 1 662.4,3202.76 r90 bottom
R1405 "22R 1%" 1 853.35,2068.9 r90 top
R1406 "NC" 1 733.27,2677.17 r90 top
R1407 "75R 1%" 1 612.2,3202.76 r90 bottom
R1408 "5.1K 1%" 1 845.47,2402.56 r90 bottom
R1409 "NC" 1 795.28,2678.15 r90 top
R1410 "22R 1%" 1 818.9,2068.9 r90 top
R1411 "NC" 1 543.31,2677.17 r90 top
R1412 "330R 1%" 1 1067.91,3261.81 r90 top
R1413 "10K 1%" 1 548.23,1051.18 r90 bottom
R1414 "6.81K 1%" 7 637.8,1158.46 r0 top
R1415 "10K 1%" 1 588.58,1159.45 r90 top
R1417 "15K 1%" 7 3217.52,2678.15 r0 top
R1418 "10K 1%" 1 3328.74,2680.12 r0 top
R1420 "4.02K 1%" 7 466.54,1750 r0 top
R1421 "2K 1%" 1 402.56,1750.98 r90 top
R1481 "33R 1%" 1 1415.35,696.85 r90 bottom
R1482 "3K 5%" 7 1677.17,786.42 r270 bottom
R1483 "1.2K 5%" 7 1615.16,786.42 r270 bottom
R1485 "NC" 1 433.07,2291.34 r90 bottom
R1487 "22R 1%" 1 2062.01,794.29 r90 top
R1488 "22R 1%" 1 2102.36,794.29 r90 top
R1491 "22R 1%" 1 1500.98,794.29 r90 top
R1492 "22R 1%" 1 1541.34,798.23 r90 top
R1493 "NC" 1 1975.39,1493.11 r180 bottom
R1494 "0R 1%" 1 1314.96,1522.64 r180 bottom
R1495 "0R 1%" 1 1314.96,1571.85 r180 bottom
R1496 "0R 1%" 1 1314.96,1622.05 r180 bottom
R1497 "NC" 1 1389.76,1571.85 r180 bottom
R1498 "NC" 1 1388.78,1622.05 r180 bottom
R1499 "NC" 1 1389.76,1522.64 r180 bottom
R1500 "330R 1%" 1 1344.49,1615.16 r90 top
R1501 "330R 1%" 1 1304.13,1615.16 r90 top
R1502 "4.7K 1%" 1 1830.71,1647.64 r180 bottom
R1503 "4.7K 1%" 1 1384.84,1615.16 r90 top
R1504 "22R 1%" 1 2767.72,2105.31 r90 top
R1505 "22R 1%" 1 2642.72,2110.24 r90 top
R1506 "22R 1%" 1 2596.46,2110.24 r90 top
R1507 "4.7K 1%" 1 2687.99,2185.04 r90 top
R1948 "100K 1%" 1 317.91,1945.87 r180 bottom
R1949 "NC" 1 317.91,1987.2 r180 bottom
R1950 "10K 1%" 1 532.48,1977.36 r180 bottom
R1995 "10K 1%" 1 462.6,2455.71 r90 bottom
R2159 "1.2K 1%" 1 1421.26,1773.62 r90 bottom
R2161 "1.2K 1%" 1 1420.28,1702.76 r90 bottom
R2336 "10K 1%" 1 318.9,2097.44 r180 bottom
R2340 "NC" 1 3024.61,1871.06 r0 top
R2350 "10K 1%" 1 3362.2,3116.14 r0 bottom
R2389 "NC" 1 2887.8,2184.05 r90 bottom
R2391 "NC" 1 2888.78,2104.33 r90 bottom
R2392 "33R 1%" 1 532.48,2011.81 r180 bottom
R2430 "100K 1%" 1 2432.09,1517.72 r0 top
R2432 "100K 1%" 1 2156.5,1482.28 r270 bottom
R2433 "100K 1%" 1 2121.06,1482.28 r270 bottom
R2434 "NC" 1 2411.42,1483.27 r180 bottom
R2435 "NC" 1 2311.02,1258.86 r180 bottom
R2436 "22R 1%" 1 2276.58,1345.47 r0 top
R2437 "22R 1%" 1 2312.01,1222.44 r180 bottom
R2438 "NC" 1 2476.38,1262.8 r90 bottom
R2439 "NC" 1 2516.73,1263.78 r90 bottom
R2440 "NC" 1 2511.81,1092.52 r180 bottom
R2441 "NC" 1 2337.6,1440.94 r180 bottom
R2442 "NC" 1 2335.63,1483.27 r180 bottom
R2443 "NC" 1 2410.43,1437.99 r180 bottom
R2444 "NC" 1 2271.65,1188.98 r0 top
R2445 "NC" 1 2287.4,1464.57 r0 top
R2445B "NC" 1 2276.58,1310.04 r0 top
R2446 "NC" 1 2376.97,1423.23 r0 top
R2447 "NC" 1 2287.4,1510.83 r0 top
R2455 "240R 1%" 1 1925.2,2368.11 r90 bottom
R2456 "80.5R 1%" 1 1914.37,1657.48 r180 bottom
R2457 "80.5R 1%" 1 2171.26,1707.68 r180 bottom
R2458 "1.2K 1%" 1 2335.63,1775.59 r90 bottom
R2459 "1.2K 1%" 1 2332.68,1698.82 r90 bottom
R2460 "0R 5%" 7 1221.46,1527.56 r180 bottom
R2461 "22R 1%" 1 1324.8,1310.04 r0 top
R2462 "22R 1%" 1 1240.16,1230.31 r0 top
R2463 "22R 1%" 1 1240.16,1310.04 r0 top
R2464 "22R 1%" 1 1324.8,1269.68 r0 top
R2465 "22R 1%" 1 1240.16,1269.68 r0 top
R2466 "22R 1%" 1 1324.8,1229.33 r0 top
R2468 "NC" 7 1150.59,821.85 r180 bottom
R2469 "4.7K 1%" 1 897.64,2617.13 r180 bottom
R2470 "4.7K 1%" 1 897.64,2576.77 r180 bottom
R2471 "0R 5%" 7 1150.59,867.13 r180 bottom
R2472 "22R 1%" 1 1983.27,894.68 r90 top
R2473 "22R 1%" 1 2023.62,894.68 r90 top
R2473A "22R 1%" 1 2103.35,894.68 r90 top
R2474 "22R 1%" 1 2062.99,894.68 r90 top
R2476 "22R 1%" 1 2142.72,894.68 r90 top
R2477 "22R 1%" 1 2142.72,794.29 r90 top
R2478 "22R 1%" 1 2182.09,794.29 r90 top
R2479 "22R 1%" 1 2222.44,794.29 r90 top
R2480 "22R 1%" 1 2021.65,794.29 r90 top
R2481 "22R 1%" 1 1982.28,794.29 r90 top
R2482 "22R 1%" 1 2182.09,894.68 r90 top
R2483 "22R 1%" 1 2222.44,894.68 r90 top
R2484 "22R 1%" 1 1941.93,794.29 r90 top
R2485 "22R 1%" 1 1901.58,794.29 r90 top
R2486 "22R 1%" 1 1861.22,795.28 r90 top
R2487 "NC" 1 1210.63,857.28 r270 bottom
R2487A "22R 1%" 1 1861.22,894.68 r90 top
R2488 "22R 1%" 1 1821.85,894.68 r90 top
R2489 "22R 1%" 1 1780.51,894.68 r90 top
R2490 "22R 1%" 1 1742.13,894.68 r90 top
R2491 "22R 1%" 1 1701.77,894.68 r90 top
R2492 "22R 1%" 1 1901.58,894.68 r90 top
R2493 "22R 1%" 1 1942.91,894.68 r90 top
R2496 "22R 1%" 1 1662.4,794.29 r90 top
R2497 "22R 1%" 1 1622.05,794.29 r90 top
R2498 "22R 1%" 1 1581.69,794.29 r90 top
R2499 "22R 1%" 1 1581.69,894.68 r90 top
R2500 "22R 1%" 1 1541.34,894.68 r90 top
R2501 "22R 1%" 1 1500.98,894.68 r90 top
R2502 "22R 1%" 1 1460.63,894.68 r90 top
R2503 "22R 1%" 1 1418.31,894.68 r90 top
R2504 "22R 1%" 1 1701.77,794.29 r90 top
R2505 "22R 1%" 1 1781.5,794.29 r90 top
R2506 "22R 1%" 1 1821.85,794.29 r90 top
R2507 "22R 1%" 1 1742.13,794.29 r90 top
R2508 "22R 1%" 1 1420.28,794.29 r90 top
R2509 "22R 1%" 1 1461.61,794.29 r90 top
R2510 "22R 1%" 1 1662.4,894.68 r90 top
R2511 "22R 1%" 1 1622.05,894.68 r90 top
R2512 "0R 1%" 1 2065.95,1462.6 r180 bottom
R2513 "10R 1%" 1 1600.39,1997.05 r90 bottom
R2514 "10R 1%" 1 1819.88,2087.6 r90 bottom
R2515 "10R 1%" 1 1599.41,2086.61 r90 bottom
R2516 "10R 1%" 1 1900.59,2088.58 r90 bottom
R2517 "10R 1%" 1 1524.61,1998.03 r90 bottom
R2518 "10R 1%" 1 1861.22,2088.58 r90 bottom
R2519 "10R 1%" 1 1701.77,2087.6 r90 bottom
R2520 "10R 1%" 1 1800.2,1998.03 r90 bottom
R2521 "10R 1%" 1 1680.12,1998.03 r90 bottom
R2522 "10R 1%" 1 1760.83,1998.03 r90 bottom
R2523 "10R 1%" 1 1741.14,2087.6 r90 bottom
R2524 "10R 1%" 1 1781.5,2087.6 r90 bottom
R2525 "10R 1%" 1 1840.55,1998.03 r90 bottom
R2526 "10R 1%" 1 1880.91,1998.03 r90 bottom
R2527 "10R 1%" 1 1961.61,1998.03 r90 bottom
R2528 "10R 1%" 1 1921.26,1998.03 r90 bottom
R2529 "10R 1%" 1 1981.3,2087.6 r90 bottom
R2530 "10R 1%" 1 2000.98,1999.02 r90 bottom
R2531 "10R 1%" 1 1940.95,2087.6 r90 bottom
R2532 "10R 1%" 1 1560.04,1996.06 r90 bottom
R2533 "10R 1%" 1 1559.06,2087.6 r90 bottom
R2534 "10R 1%" 1 1721.46,1998.03 r90 bottom
R2535 "10R 1%" 1 1489.17,1998.03 r90 bottom
R2536 "10R 1%" 1 1640.75,1997.05 r90 bottom
R2537 "1.2K 1%" 1 2066.93,2816.93 r0 bottom
R2538 "1.2K 1%" 1 2065.95,2933.07 r0 bottom
R2539 "20K 1%" 1 1965.55,1403.54 r90 bottom
R2540 "NC" 1 1691.93,1307.09 r180 bottom
R2541 "20K 1%" 1 1692.91,1274.61 r180 bottom
R2542 "80.5R 1%" 1 1744.09,1943.9 r0 top
R2543 "NC" 1 2376.97,1464.57 r0 top
R2544 "10K 1%" 1 3557.09,3116.14 r0 top
R2545 "10K 1%" 1 3632.87,3116.14 r0 top
R2546 "10K 1%" 1 3361.22,3117.13 r0 top
R2547 "10K 1%" 1 3136.81,3110.24 r0 top
R2548 "10K 1%" 1 2856.3,3110.24 r0 top
R2549 "10K 1%" 1 3064.96,3111.22 r0 top
R2551 "1K 1%" 1 3542.32,3375 r0 bottom
R2552 "NC" 7 3451.77,3117.13 r0 top
R2553 "NC" 7 2944.88,3111.22 r0 top
R2554 "NC" 7 3512.8,3116.14 r180 bottom
R2556 "10K 1%" 1 2856.3,3110.24 r0 bottom
R2557 "NC" 7 3007.87,3110.24 r180 bottom
R2558 "1M 5%" 43 3614.17,1604.33 r180 bottom
R2559 "1M 5%" 43 3610.24,1313.98 r180 bottom
R2560 "4.7K 1%" 1 990.16,2152.56 r90 top
R2577 "NC" 1 2802.17,1027.56 r180 bottom
R2578 "20K 1%" 1 2869.09,829.72 r90 top
R2579 "NC" 1 2807.09,1743.11 r90 bottom
R2580 "NC" 1 2912.4,1743.11 r90 bottom
R2581 "NC" 1 2832.68,829.72 r90 top
R2582 "NC" 1 2983.27,1744.09 r90 bottom
R2583 "NC" 1 3089.57,1744.09 r90 bottom
R2584 "20K 1%" 1 2802.17,992.13 r180 bottom
R2585 "NC" 1 2903.54,829.72 r90 top
R2586 "20K 1%" 1 2842.52,1744.09 r90 bottom
R2587 "20K 1%" 1 2876.97,1743.11 r90 bottom
R2588 "20K 1%" 1 2798.23,829.72 r90 top
R2590 "20K 1%" 1 3053.15,1744.09 r90 bottom
R2598 "20K 1%" 1 2947.83,1743.11 r90 bottom
R2599 "10K 1%" 1 219.49,1740.16 r0 top
R2602 "0R 1%" 1 2727.36,2185.04 r90 top
R2603 "0R 1%" 1 3573.82,2354.33 r0 bottom
R2604 "0R 1%" 1 3585.63,2757.87 r0 bottom
R2605 "0R 1%" 1 338.58,1750 r90 top
R2608 "NC" 1 2270.67,1155.51 r0 top
R2609 "NC" 1 2271.65,1225.39 r0 top
R2615 "NC" 1 1248.03,2722.44 r0 top
R2616 "NC" 1 1248.03,2683.07 r0 top
R2617 "NC" 1 1033.46,2847.44 r0 top
R2618 "NC" 1 1325.79,2826.77 r90 top
R2619 "NC" 1 1033.46,2807.09 r0 top
R2621 "NC" 1 1902.56,2897.64 r90 bottom
R2622 "NC" 1 1705.71,2993.11 r90 bottom
R2623 "NC" 1 1866.14,2992.13 r90 bottom
R2624 "NC" 1 1865.16,2897.64 r90 bottom
R2625 "NC" 1 1666.34,2993.11 r90 bottom
R2626 "NC" 1 1825.79,2897.64 r90 bottom
R2627 "NC" 1 1585.63,2897.64 r90 bottom
R2628 "NC" 1 1825.79,2993.11 r90 bottom
R2629 "NC" 1 1585.63,2992.13 r90 bottom
R2630 "NC" 1 1786.42,2897.64 r90 bottom
R2631 "NC" 1 1747.05,2897.64 r90 bottom
R2632 "NC" 1 1625,2896.65 r90 bottom
R2633 "NC" 1 1706.69,2897.64 r90 bottom
R2634 "NC" 1 1786.42,2993.11 r90 bottom
R2635 "NC" 1 1625.98,2993.11 r90 bottom
R2636 "NC" 1 1905.51,2992.13 r90 bottom
R2637 "NC" 1 1665.35,2896.65 r90 bottom
R2638 "NC" 1 1943.57,2897.64 r90 bottom
R2639 "NC" 1 2025.59,2993.11 r90 bottom
R2640 "NC" 1 2025.59,2898.62 r90 bottom
R2641 "NC" 1 1986.22,2993.11 r90 bottom
R2641A "0R 1%" 1 1943.9,3376.97 r90 top
R2642 "NC" 1 1984.58,2897.64 r90 bottom
R2643 "NC" 1 1945.87,2993.11 r90 bottom
R2644 "NC" 1 1746.06,2993.11 r90 bottom
R2645 "4.7K 1%" 1 1750.98,2766.73 r90 bottom
R2646 "0R 1%" 1 1818.9,3376.97 r90 top
R2647 "0R 1%" 1 1778.54,3376.97 r90 top
R2648 "10K 1%" 1 2064.96,3376.97 r90 top
R2650 "0R 1%" 1 1984.25,3376.97 r90 top
R2800 "10K 1%" 1 340.55,1893.7 r270 bottom
R3555 "1K 1%" 1 2973.43,3366.14 r0 bottom
S2 "6*6*5MM" 32 1445.87,3582.68 r0 top
S3 "NC" 32 1841.54,3580.71 r0 top
T6 "BT16B03" 15 461.61,2815.94 r0 top
TP1 "3V3" 30 3038.39,2585.63 r0 top
TP2 "VDD_1V5" 30 3042.32,2931.1 r0 top
TP3 "1V8" 30 827.76,1627.95 r0 top
TP4 "1V9" 30 906.5,1083.66 r0 top
U7 "NC" 16 2343.5,3359.25 r0 top
U12 "W29N01HVSINA" 14 3180.12,1750.98 r0 top
U20 "MMBT3904/1AM" 41 321.85,1567.91 r180 bottom
U21 "MMBT3904/1AM" 41 250.98,1728.35 r90 bottom
U22 "J37I" 10 3612.2,2405.51 r0 top
U23 "NC" 26 1303.15,714.57 r0 top
U24 "IP101GA" 13 569.88,2217.52 r0 top
U25 "RJ45" 35 618.11,3659.45 r0 top
U26 "J37I" 10 510.83,986.22 r180 top
U27 "J37I" 10 3623.03,2810.04 r0 top
U28 "J37I" 10 299.21,1567.91 r180 top
U30 "ACOI" 41 1546.26,699.8 r180 bottom
U31 "XC7Z010-1CLG400I" BGA400X20 2144.69,1800.2 r270 top
U65 "SGM706-SYS8" 11 293.31,2097.44 r0 top
U66 "EM6GD16EWKG-12H" BGA256X16 2261.89,2713.48 r270 top
U67 "EL817" 17 3667.32,3197.83 r0 top
U68 "EL817" 17 3161.42,3195.87 r0 top
U69 "PC817" 17 3669.29,3295.28 r0 bottom
U70 "PC817" 17 3162.4,3295.28 r0 bottom
U72 "NC" 12 1257.87,2788.39 r0 top
X3 "NC" 11 2611.22,1100.39 r180 top
X5 "NC" 25 1256.89,1058.07 r0 top
X8 "33.333MHZ" 23 2923.23,2187.01 r0 top
Y2 "NC" 27 2579.72,904.53 r0 top
Y3 "25.000MHZ" 28 301.18,2319.88 r0 top

## Footprints (in the part's own frame and the unit in brackets; to place one, negate y for a bottom-side part, rotate by r counter-clockwise, add the part's x,y. Pads: shape width x height; smd on the part's side, far side on the other; paste and mask are expansions set on the pad)
1 [mm]
  round 0.6 smd: 1(0,0) 2(1,0)
  silkscreen extent -0.58,-0.58 1.57,0.6
2 [mm]
  rect 1x1.15 smd: 1(0,0) 2(1.75,0)
  silkscreen extent -0.92,-0.95 2.6,1.05
3 [mm]
  round 0.6 smd: 1(0,0) 2(0,1)
  silkscreen extent -0.58,-0.55 0.6,1.6
6 [mm]
  rect 0.9x0.7 smd: 1(0,0) 2(1.425,0)
  silkscreen extent -0.82,-0.7 2.22,0.67
7 [mm]
  rect 0.9x0.7 smd: 1(0,0) 2(1.525,0)
  silkscreen extent -0.77,-0.67 2.3,0.72
8 [mm]
  rect 0.7x0.9 smd: 1(0,-1.55) 2(0,0)
  silkscreen extent -0.67,-2.3 0.63,1.02
9 [mm]
  rect 1x1.6 smd: 1(0,0) 2(3,0)
  silkscreen extent -0.88,-1.2 3.77,1.22
10 [mm]
  rect 0.7x1 smd: 1(0,0) 2(-0.975,0) 3(-1.95,0) 4(-1.95,-2.6) 5(-0.975,-2.6) 6(0,-2.6)
  silkscreen extent -2.45,-1.83 0.9,0.38
11 [mm]
  oval 1.95x0.55 smd: 1(0,0) 2(0,-1.275) 3(0,-2.55) 4(0,-3.825) 5(5.575,-3.825) 6(5.575,-2.55) 7(5.575,-1.275) 8(5.575,0)
  silkscreen extent -1.97,-4.4 4.05,0.68
12 [mm]
  oval 0.8x0.3 smd: 1(0,0) 2(0,0.5) 3(0,1) 4(0,1.5) 5(0,2) 6(-3,2) 7(-3,1.5) 8(-3,1) 9(-3,0.5) 10(-3,0)
  rect 0.3x0.55 smd: 11(-1.775,-0.65) 12(-1.225,-0.65) 13(-1.225,2.6) 14(-1.775,2.6)
  rect 1.65x2.4 smd: 15(-1.475,1)
  silkscreen extent -3.03,-0.5 1.02,2.5
13 [mm]
  oval 0.25x1.4 smd: 1(0,0) 2(0.505,0) 3(1.009,0) 4(1.514,0) 5(2.018,0) 6(2.523,0) 7(3.027,0) 8(3.532,0) 9(4.036,0) 10(4.541,0) 11(5.045,0) 12(5.55,0) 25(5.55,8.175) 26(5.045,8.175) 27(4.541,8.175) 28(4.036,8.175) 29(3.532,8.175) 30(3.027,8.175) 31(2.523,8.175) 32(2.018,8.175) 33(1.514,8.175) 34(1.009,8.175) 35(0.505,8.175) 36(0,8.175)
  oval 1.4x0.25 smd: 13(6.9,1.375) 14(6.9,1.873) 15(6.9,2.37) 16(6.9,2.868) 17(6.9,3.366) 18(6.9,3.864) 19(6.9,4.361) 20(6.9,4.859) 21(6.9,5.357) 22(6.9,5.855) 23(6.9,6.352) 24(6.9,6.85) 37(-1.35,6.85) 38(-1.35,6.352) 39(-1.35,5.855) 40(-1.35,5.357) 41(-1.35,4.859) 42(-1.35,4.361) 43(-1.35,3.864) 44(-1.35,3.366) 45(-1.35,2.868) 46(-1.35,2.37) 47(-1.35,1.873) 48(-1.35,1.375)
  silkscreen extent -3.47,-2.25 9.08,10.4
14 [mm]
  rect 0.25x1.25 smd: 1(0,0) 2(-0.503,0) 3(-1.007,0) 4(-1.51,0) 5(-2.013,0) 6(-2.516,0) 7(-3.02,0) 8(-3.523,0) 9(-4.026,0) 10(-4.529,0) 11(-5.033,0) 12(-5.536,0) 13(-6.039,0) 14(-6.542,0) 15(-7.046,0) 16(-7.549,0) 17(-8.052,0) 18(-8.555,0) 19(-9.059,0) 20(-9.562,0) 21(-10.065,0) 22(-10.568,0) 23(-11.072,0) 24(-11.575,0) 25(-11.575,-19.85) 26(-11.072,-19.85) 27(-10.568,-19.85) 28(-10.065,-19.85) 29(-9.562,-19.85) 30(-9.059,-19.85) 31(-8.555,-19.85) 32(-8.052,-19.85) 33(-7.549,-19.85) 34(-7.046,-19.85) 35(-6.542,-19.85) 36(-6.039,-19.85) 37(-5.536,-19.85) 38(-5.033,-19.85) 39(-4.529,-19.85) 40(-4.026,-19.85) 41(-3.523,-19.85) 42(-3.02,-19.85) 43(-2.516,-19.85) 44(-2.013,-19.85) 45(-1.51,-19.85) 46(-1.007,-19.85) 47(-0.503,-19.85) 48(0,-19.85)
  silkscreen extent -11.95,-21.63 1.9,1.87
15 [mm]
  rect 0.65x2.5 smd: 1(0,0) 2(1.279,0) 3(2.557,0) 4(3.836,0) 5(5.114,0) 6(6.393,0) 7(7.671,0) 8(8.95,0) 9(8.95,9.725) 10(7.671,9.725) 11(6.393,9.725) 12(5.114,9.725) 13(3.836,9.725) 14(2.557,9.725) 15(1.279,9.725) 16(0,9.725)
  silkscreen extent -1.92,-1.05 10.82,7.8
16 [mm]
  rect 0.6x1.5 smd: 1(0,0) 2(1.097,0) 3(2.194,0) 4(3.291,0) 5(4.387,0) 6(5.484,0) 7(6.581,0) 8(7.678,0) 9(8.775,0)
  rect 1x1.3 smd: 10(10.075,0.525)
  rect 1.1x2.2 smd: 11(10.025,10.15) 12(-5.6,10.1)
  rect 1.5x1.25 smd: 13(-4.6,0.55)
  silkscreen extent -4.95,0.82 9.53,14.3
17 [mm]
  rect 2.1x1.5 smd: 1(0,0) 2(0,2.525) 3(-9.45,2.525) 4(-9.45,0)
  silkscreen extent -8,-1.54 0.25,3.67
21 [mm]
  rect 2x5 smd: 1(0,0) 2(4.45,0)
  silkscreen extent -2.45,-4.15 6.93,4.15
23 [mm]
  rect 2.5x2 smd: 1(0,0) 2(0,-6.125) 3(3.55,-6.125) 4(3.55,0)
  silkscreen extent -3.27,-7.4 5.12,1.3
24 [mm]
  rect 4.5x1.85 smd: 1(0,0) 2(-8.65,0)
  silkscreen extent -9.35,-5.05 0.7,5
25 [mm]
  rect 1.3x1.1 smd: 1(0,0) 2(0,1.625) 3(2.15,1.625) 4(2.15,0)
  silkscreen extent -1.02,-1.63 3.17,2.55
26 [mm]
  rect 1.95x1.35 smd: 1(0,0) 2(0,2.312) 3(0,4.625)
  rect 2x3.3 smd: 4(-6.3,2.275)
  silkscreen extent -5,-0.85 -1.3,5.43
27 [mm]
  rect 1.35x1.85 smd: 1(0,0) 2(0,-2.975) 3(-5.95,-2.975) 4(-5.95,0)
  round 1.4 hole 1: 5(-3.975,0.075) 6(-3.975,-3.125)
  round 0.8 hole 0.5: 7(1.6,-2.225) 8(1.6,-0.825)
  silkscreen extent -8.23,-3.45 3.09,1.83
28 [mm]
  rect 1.45x4.95 smd: 1(0,0) 2(0,9)
  silkscreen extent -2.6,-1.22 2.47,10.43
29 [mm]
  rect 3.15x1.25 smd: 1(0,0) 2(5.35,0)
  silkscreen extent -0.6,-3.35 6,3.32
30 [mm]
  round 1.4 hole 0.9: 1(0,0)
  silkscreen extent -1,-0.92 0.9,0.97
31 [mm]
  rect 1.6x1.6 hole 1.1: 1(0,0)
  round 1.6 hole 1.1: 2(2.542,0) 3(5.083,0) 4(7.625,0)
  silkscreen extent -2.57,-1.25 10.15,5.07
32 [mm]
  round 2.5 hole 1.4: 1(0,0) 2(7.025,0)
  round 1.6 hole 1.1: 3(5.825,2.525) 4(1.275,2.525)
  silkscreen extent -0.3,-1.43 7.25,7.6
33 [mm]
  rect 1.5x1.5 hole 1.1: 1(0,0)
  round 1.5 hole 1.1: 2(-2.55,0) 3(-5.1,0) 4(-7.65,0)
  silkscreen extent -8.97,-1.28 1.23,1.3
34 [mm]
  round 1.5 hole 1: 1(0,0) 2(0,2.575) 3(-2.625,2.575) 4(-2.625,0)
  silkscreen extent -3.58,-1.9 0.82,8.62
35 [mm]
  rect 1.5x1.5 hole 1: 1(0,0)
  round 1.5 hole 1: 2(1,-1.775) 3(2.042,0) 4(3.058,-1.775) 5(4.083,0) 6(5.117,-1.775) 7(6.125,0) 8(7.175,-1.775) 9(10.475,-6.55) 10(8.2,-6.55) 11(-0.975,-6.55) 12(-3.275,-6.55)
  Keep-Out Layer circle w0.2: c9.984,2.475 r1.591
  Keep-Out Layer circle w0.2: c-2.791,2.45 r1.591
  silkscreen extent -4.67,-7.85 11.65,6.65
36 [mm]
  rect 1.5x1.5 hole 1: 1(0,0)
  round 1.5 hole 1: 2(-2.5,0) 3(0,2.533) 4(-2.5,2.533) 5(0,5.067) 6(-2.5,5.067) 7(0,7.6) 8(-2.5,7.6) 9(0,10.133) 10(-2.5,10.133) 11(0,12.667) 12(-2.5,12.667) 13(0,15.2) 14(-2.5,15.2)
  silkscreen extent -3.88,-1.23 2.75,16.45
37 [mm]
  round 1.5 hole 1: 1(0,0) 2(0,-1.975) 3(-2.006,0) 4(-2.006,-1.975) 5(-4.011,0) 6(-4.011,-1.975) 7(-6.017,0) 8(-6.017,-1.975) 9(-8.022,0) 10(-8.022,-1.975) 11(-10.028,0) 12(-10.028,-1.975) 13(-12.033,0) 14(-12.033,-1.975) 15(-14.039,0) 16(-14.039,-1.975) 17(-16.044,0) 18(-16.044,-1.975) 19(-18.05,0) 20(-18.05,-1.975)
  silkscreen extent -20.32,-8.97 2.33,0.9
38 [mm]
  round 2.7 hole 1.7: 1(0,0) 2(0,5.575) 3(-4.225,0) 4(-4.225,5.575) 5(-8.45,0) 6(-8.45,5.575)
  silkscreen extent -11.47,-11.83 3.05,4.2
39 [mm]
  rect 1.3x0.9 smd: 1(0,0) 2(0,-1.875)
  silkscreen extent -0.95,-2.6 0.88,0.65
40 [mm]
  rect 0.7x0.9 smd: 1(0,0) 2(0,-1.575)
  silkscreen extent -0.8,-2.22 0.7,0.77
41 [mm]
  rect 0.95x1.35 smd: 1(0,0) 2(1.875,0) 3(0.975,2.15)
  silkscreen extent -0.8,0.2 2.5,1.9
42 [mm]
  rect 2.75x3.85 smd: 1(0,0) 2(8.025,0)
  silkscreen extent -1.78,-3.08 9.95,3.03
43 [mm]
  rect 1.1x1.7 smd: 1(0,0) 2(3.025,0)
  silkscreen extent -0.85,-1.27 3.85,1.13
44 [mm]
  rect 1.1x1.7 smd: 1(0,0) 2(3.025,0)
  silkscreen extent -0.82,-1.27 3.82,1.12
BGA256X16 [mm]
  round 0.35 smd: A1(0,0) A2(0.8,0) A3(1.6,0) A7(4.8,0) A8(5.6,0) A9(6.4,0) B1(0,-0.8) B2(0.8,-0.8) B3(1.6,-0.8) B7(4.8,-0.8) B8(5.6,-0.8) B9(6.4,-0.8) C1(0,-1.6) C2(0.8,-1.6) C3(1.6,-1.6) C7(4.8,-1.6) C8(5.6,-1.6) C9(6.4,-1.6) D1(0,-2.4) D2(0.8,-2.4) D3(1.6,-2.4) D7(4.8,-2.4) D8(5.6,-2.4) D9(6.4,-2.4) E1(0,-3.2) E2(0.8,-3.2) E3(1.6,-3.2) E7(4.8,-3.2) E8(5.6,-3.2) E9(6.4,-3.2) F1(0,-4) F2(0.8,-4) F3(1.6,-4) F7(4.8,-4) F8(5.6,-4) F9(6.4,-4) G1(0,-4.8) G2(0.8,-4.8) G3(1.6,-4.8) G7(4.8,-4.8) G8(5.6,-4.8) G9(6.4,-4.8) H1(0,-5.6) H2(0.8,-5.6) H3(1.6,-5.6) H7(4.8,-5.6) H8(5.6,-5.6) H9(6.4,-5.6) J1(0,-6.4) J2(0.8,-6.4) J3(1.6,-6.4) J7(4.8,-6.4) J8(5.6,-6.4) J9(6.4,-6.4) K1(0,-7.2) K2(0.8,-7.2) K3(1.6,-7.2) K7(4.8,-7.2) K8(5.6,-7.2) K9(6.4,-7.2) L1(0,-8) L2(0.8,-8) L3(1.6,-8) L7(4.8,-8) L8(5.6,-8) L9(6.4,-8) M1(0,-8.8) M2(0.8,-8.8) M3(1.6,-8.8) M7(4.8,-8.8) M8(5.6,-8.8) M9(6.4,-8.8) N1(0,-9.6) N2(0.8,-9.6) N3(1.6,-9.6) N7(4.8,-9.6) N8(5.6,-9.6) N9(6.4,-9.6) P1(0,-10.4) P2(0.8,-10.4) P3(1.6,-10.4) P7(4.8,-10.4) P8(5.6,-10.4) P9(6.4,-10.4) R1(0,-11.2) R2(0.8,-11.2) R3(1.6,-11.2) R7(4.8,-11.2) R8(5.6,-11.2) R9(6.4,-11.2) T1(0,-12) T2(0.8,-12) T3(1.6,-12) T7(4.8,-12) T8(5.6,-12) T9(6.4,-12)
  silkscreen extent -0.8,-12.8 8.13,0.8
BGA400X20 [mm]
  round 0.4 smd: A1(0,0) A2(0.8,0) A3(1.6,0) A4(2.4,0) A5(3.2,0) A6(4,0) A7(4.8,0) A8(5.6,0) A9(6.4,0) A10(7.2,0) A11(8,0) A12(8.8,0) A13(9.6,0) A14(10.4,0) A15(11.2,0) A16(12,0) A17(12.8,0) A18(13.6,0) A19(14.4,0) A20(15.2,0) B1(0,-0.8) B2(0.8,-0.8) B3(1.6,-0.8) B4(2.4,-0.8) B5(3.2,-0.8) B6(4,-0.8) B7(4.8,-0.8) B8(5.6,-0.8) B9(6.4,-0.8) B10(7.2,-0.8) B11(8,-0.8) B12(8.8,-0.8) B13(9.6,-0.8) B14(10.4,-0.8) B15(11.2,-0.8) B16(12,-0.8) B17(12.8,-0.8) B18(13.6,-0.8) B19(14.4,-0.8) B20(15.2,-0.8) C1(0,-1.6) C2(0.8,-1.6) C3(1.6,-1.6) C4(2.4,-1.6) C5(3.2,-1.6) C6(4,-1.6) C7(4.8,-1.6) C8(5.6,-1.6) C9(6.4,-1.6) C10(7.2,-1.6) C11(8,-1.6) C12(8.8,-1.6) C13(9.6,-1.6) C14(10.4,-1.6) C15(11.2,-1.6) C16(12,-1.6) C17(12.8,-1.6) C18(13.6,-1.6) C19(14.4,-1.6) C20(15.2,-1.6) D1(0,-2.4) D2(0.8,-2.4) D3(1.6,-2.4) D4(2.4,-2.4) D5(3.2,-2.4) D6(4,-2.4) D7(4.8,-2.4) D8(5.6,-2.4) D9(6.4,-2.4) D10(7.2,-2.4) D11(8,-2.4) D12(8.8,-2.4) D13(9.6,-2.4) D14(10.4,-2.4) D15(11.2,-2.4) D16(12,-2.4) D17(12.8,-2.4) D18(13.6,-2.4) D19(14.4,-2.4) D20(15.2,-2.4) E1(0,-3.2) E2(0.8,-3.2) E3(1.6,-3.2) E4(2.4,-3.2) E5(3.2,-3.2) E6(4,-3.2) E7(4.8,-3.2) E8(5.6,-3.2) E9(6.4,-3.2) E10(7.2,-3.2) E11(8,-3.2) E12(8.8,-3.2) E13(9.6,-3.2) E14(10.4,-3.2) E15(11.2,-3.2) E16(12,-3.2) E17(12.8,-3.2) E18(13.6,-3.2) E19(14.4,-3.2) E20(15.2,-3.2) F1(0,-4) F2(0.8,-4) F3(1.6,-4) F4(2.4,-4) F5(3.2,-4) F6(4,-4) F7(4.8,-4) F8(5.6,-4) F9(6.4,-4) F10(7.2,-4) F11(8,-4) F12(8.8,-4) F13(9.6,-4) F14(10.4,-4) F15(11.2,-4) F16(12,-4) F17(12.8,-4) F18(13.6,-4) F19(14.4,-4) F20(15.2,-4) G1(0,-4.8) G2(0.8,-4.8) G3(1.6,-4.8) G4(2.4,-4.8) G5(3.2,-4.8) G6(4,-4.8) G7(4.8,-4.8) G8(5.6,-4.8) G9(6.4,-4.8) G10(7.2,-4.8) G11(8,-4.8) G12(8.8,-4.8) G13(9.6,-4.8) G14(10.4,-4.8) G15(11.2,-4.8) G16(12,-4.8) G17(12.8,-4.8) G18(13.6,-4.8) G19(14.4,-4.8) G20(15.2,-4.8) H1(0,-5.6) H2(0.8,-5.6) H3(1.6,-5.6) H4(2.4,-5.6) H5(3.2,-5.6) H6(4,-5.6) H7(4.8,-5.6) H8(5.6,-5.6) H9(6.4,-5.6) H10(7.2,-5.6) H11(8,-5.6) H12(8.8,-5.6) H13(9.6,-5.6) H14(10.4,-5.6) H15(11.2,-5.6) H16(12,-5.6) H17(12.8,-5.6) H18(13.6,-5.6) H19(14.4,-5.6) H20(15.2,-5.6) J1(0,-6.4) J2(0.8,-6.4) J3(1.6,-6.4) J4(2.4,-6.4) J5(3.2,-6.4) J6(4,-6.4) J7(4.8,-6.4) J8(5.6,-6.4) J9(6.4,-6.4) J10(7.2,-6.4) J11(8,-6.4) J12(8.8,-6.4) J13(9.6,-6.4) J14(10.4,-6.4) J15(11.2,-6.4) J16(12,-6.4) J17(12.8,-6.4) J18(13.6,-6.4) J19(14.4,-6.4) J20(15.2,-6.4) K1(0,-7.2) K2(0.8,-7.2) K3(1.6,-7.2) K4(2.4,-7.2) K5(3.2,-7.2) K6(4,-7.2) K7(4.8,-7.2) K8(5.6,-7.2) K9(6.4,-7.2) K10(7.2,-7.2) K11(8,-7.2) K12(8.8,-7.2) K13(9.6,-7.2) K14(10.4,-7.2) K15(11.2,-7.2) K16(12,-7.2) K17(12.8,-7.2) K18(13.6,-7.2) K19(14.4,-7.2) K20(15.2,-7.2) L1(0,-8) L2(0.8,-8) L3(1.6,-8) L4(2.4,-8) L5(3.2,-8) L6(4,-8) L7(4.8,-8) L8(5.6,-8) L9(6.4,-8) L10(7.2,-8) L11(8,-8) L12(8.8,-8) L13(9.6,-8) L14(10.4,-8) L15(11.2,-8) L16(12,-8) L17(12.8,-8) L18(13.6,-8) L19(14.4,-8) L20(15.2,-8) M1(0,-8.8) M2(0.8,-8.8) M3(1.6,-8.8) M4(2.4,-8.8) M5(3.2,-8.8) M6(4,-8.8) M7(4.8,-8.8) M8(5.6,-8.8) M9(6.4,-8.8) M10(7.2,-8.8) M11(8,-8.8) M12(8.8,-8.8) M13(9.6,-8.8) M14(10.4,-8.8) M15(11.2,-8.8) M16(12,-8.8) M17(12.8,-8.8) M18(13.6,-8.8) M19(14.4,-8.8) M20(15.2,-8.8) N1(0,-9.6) N2(0.8,-9.6) N3(1.6,-9.6) N4(2.4,-9.6) N5(3.2,-9.6) N6(4,-9.6) N7(4.8,-9.6) N8(5.6,-9.6) N9(6.4,-9.6) N10(7.2,-9.6) N11(8,-9.6) N12(8.8,-9.6) N13(9.6,-9.6) N14(10.4,-9.6) N15(11.2,-9.6) N16(12,-9.6) N17(12.8,-9.6) N18(13.6,-9.6) N19(14.4,-9.6) N20(15.2,-9.6) P1(0,-10.4) P2(0.8,-10.4) P3(1.6,-10.4) P4(2.4,-10.4) P5(3.2,-10.4) P6(4,-10.4) P7(4.8,-10.4) P8(5.6,-10.4) P9(6.4,-10.4) P10(7.2,-10.4) P11(8,-10.4) P12(8.8,-10.4) P13(9.6,-10.4) P14(10.4,-10.4) P15(11.2,-10.4) P16(12,-10.4) P17(12.8,-10.4) P18(13.6,-10.4) P19(14.4,-10.4) P20(15.2,-10.4) R1(0,-11.2) R2(0.8,-11.2) R3(1.6,-11.2) R4(2.4,-11.2) R5(3.2,-11.2) R6(4,-11.2) R7(4.8,-11.2) R8(5.6,-11.2) R9(6.4,-11.2) R10(7.2,-11.2) R11(8,-11.2) R12(8.8,-11.2) R13(9.6,-11.2) R14(10.4,-11.2) R15(11.2,-11.2) R16(12,-11.2) R17(12.8,-11.2) R18(13.6,-11.2) R19(14.4,-11.2) R20(15.2,-11.2) T1(0,-12) T2(0.8,-12) T3(1.6,-12) T4(2.4,-12) T5(3.2,-12) T6(4,-12) T7(4.8,-12) T8(5.6,-12) T9(6.4,-12) T10(7.2,-12) T11(8,-12) T12(8.8,-12) T13(9.6,-12) T14(10.4,-12) T15(11.2,-12) T16(12,-12) T17(12.8,-12) T18(13.6,-12) T19(14.4,-12) T20(15.2,-12) U1(0,-12.8) U2(0.8,-12.8) U3(1.6,-12.8) U4(2.4,-12.8) U5(3.2,-12.8) U6(4,-12.8) U7(4.8,-12.8) U8(5.6,-12.8) U9(6.4,-12.8) U10(7.2,-12.8) U11(8,-12.8) U12(8.8,-12.8) U13(9.6,-12.8) U14(10.4,-12.8) U15(11.2,-12.8) U16(12,-12.8) U17(12.8,-12.8) U18(13.6,-12.8) U19(14.4,-12.8) U20(15.2,-12.8) V1(0,-13.6) V2(0.8,-13.6) V3(1.6,-13.6) V4(2.4,-13.6) V5(3.2,-13.6) V6(4,-13.6) V7(4.8,-13.6) V8(5.6,-13.6) V9(6.4,-13.6) V10(7.2,-13.6) V11(8,-13.6) V12(8.8,-13.6) V13(9.6,-13.6) V14(10.4,-13.6) V15(11.2,-13.6) V16(12,-13.6) V17(12.8,-13.6) V18(13.6,-13.6) V19(14.4,-13.6) V20(15.2,-13.6) W1(0,-14.4) W2(0.8,-14.4) W3(1.6,-14.4) W4(2.4,-14.4) W5(3.2,-14.4) W6(4,-14.4) W7(4.8,-14.4) W8(5.6,-14.4) W9(6.4,-14.4) W10(7.2,-14.4) W11(8,-14.4) W12(8.8,-14.4) W13(9.6,-14.4) W14(10.4,-14.4) W15(11.2,-14.4) W16(12,-14.4) W17(12.8,-14.4) W18(13.6,-14.4) W19(14.4,-14.4) W20(15.2,-14.4) Y1(0,-15.2) Y2(0.8,-15.2) Y3(1.6,-15.2) Y4(2.4,-15.2) Y5(3.2,-15.2) Y6(4,-15.2) Y7(4.8,-15.2) Y8(5.6,-15.2) Y9(6.4,-15.2) Y10(7.2,-15.2) Y11(8,-15.2) Y12(8.8,-15.2) Y13(9.6,-15.2) Y14(10.4,-15.2) Y15(11.2,-15.2) Y16(12,-15.2) Y17(12.8,-15.2) Y18(13.6,-15.2) Y19(14.4,-15.2) Y20(15.2,-15.2)
  silkscreen extent -0.8,-16 16,0.8

## Free pads (board coordinates)
  round 236.22 hole 137.8: 1(3802.17,3460.63)
  round 236.22 hole 137.79: 2(3805.12,1105.31) 3(254.92,1094.49) 4(250,3452.76)
  round 39.37 smd far side: ""(238.19,404.53) ""(286.42,3187.99) ""(3603.35,3468.5) ""(3871.06,295.28)
  round 39.37 smd: ""(285.43,3190.94) ""(464.57,2168.31) ""(1052.17,995.08) ""(1113.19,2992.13) ""(1401.58,1740.16) ""(1461.61,2423.23) ""(2479.33,2983.27) ""(2494.09,1425.2) ""(2564.96,1849.41) ""(2770.67,3611.22) ""(3250.98,1199.8) ""(3600.39,3464.57) ""(3861.22,287.4)

## Via types
v1: diameter 16, hole 10, Top Layer to Bottom Layer, 1242 vias

## Nets (pads, with @x,y where several pads share a name; then routed paths per layer and width w, separated by ;. In a path a pad name is that pad's centre, name@x,y a point inside that pad or via, vN(x,y) a via of type N, cw(c..) or ccw(c..) an arc to the next point about the centre after c; other vN are vias at no path point)
#CE_0: R1359.1 U12.9 U31.E6 | length 1448.5
  Top Layer w6: v1@2000.98,1626.97 v1(2002.07,1626.97) U31.E6@2018.08,1642.98 ; v1@2270.67,1550.2 2271.65,1549.21 v1(2272.64,1549.21) 2358.28,1549.21 2358.53,1549.46 2523.37,1549.46 2618.11,1454.72 v1(2943.9,1454.72) ; v1(3019.69,1708.66) 3021.61,1710.59 U12.9@3021.61,1750.98
  Bottom Layer w6: v1(2002.07,1626.97) 2002.07,1624.9 2017.72,1609.25 2017.72,1555.12 2025.34,1547.5 2041.71,1547.5 2064.09,1525.12 2238.7,1525.12 2261.81,1548.23 v1@2269.69,1548.23 ; v1(2943.9,1454.72) 2943.9,1633.86 v1@3018.7,1708.66 ; v1@3018.7,1712.6 R1359.1@3018.7,1744.09
#RE_0: R2583.1 R2590.1 U12.8 U31.D5 | length 1303.5
  Top Layer w6: U31.D5@2049.73,1674.42 2065.95,1658.21 v1@2065.95,1626.97 ; v1@2219.49,1647.64 v1(2219.49,1648.62) 2242.28,1671.42 2677.01,1671.42 2743.11,1605.31 v1(3043.31,1605.31) ; U12.8@3041.42,1750.98 3041.42,1707.59 v1(3044.29,1704.72)
  Bottom Layer w6: v1(2065.95,1628.53) 2074.81,1628.53 2090.81,1644.53 2104.07,1644.53 2106.87,1641.73 2154.53,1641.73 2158.46,1645.67 v1@2219.49,1645.67 ; v1(3043.31,1605.31) 3043.31,1734.25 R2590.1@3053.15,1744.09 ; R2590.1@3055.12,1744.09 R2583.1@3089.57,1744.09
#WE_0: R2579.1 R2586.1 U12.18 U31.D6 | length 1124
  Top Layer w6: v1(2033.46,1627.95) 2048.49,1642.98 U31.D6@2049.73,1642.98 ; v1@2211.61,1590.55 2216.54,1595.47 2227.36,1595.47 2269.69,1637.79 2575.79,1637.79 2657.48,1556.1 2765.75,1556.1 v1(2766.73,1555.12) ; v1@2212,1593 v1@2212,1593.98 ; U12.18@2843.29,1750.98 2843.29,1704.94 v1(2843.5,1704.72)
  Bottom Layer w6: v1(2033.46,1627.95) 2033.46,1625.98 2046.91,1612.53 2059.42,1612.53 2104.17,1612.53 2117.3,1599.41 2180.13,1599.41 2180.38,1599.66 2204.47,1599.66 v1@2209.65,1594.49 ; v1(2766.73,1555.12) 2766.73,1626.97 2842.52,1702.76 R2586.1@2842.52,1744.09 ; R2579.1@2807.09,1743.11 R2586.1@2840.55,1743.11
  other v1: 2211.61,1595.47
ALE_0: R2580.1 R2587.1 U12.17 U31.B8 | length 1090.6
  Top Layer w6: U31.B8@2113.03,1580.09 2123.03,1570.09 2123.03,1569.88 2127.95,1564.96 2211.61,1564.96 2232.6,1585.94 2346.77,1585.94 2385.83,1625 2567.91,1625 2657.48,1535.43 v1(2792.32,1535.43) ; U12.17@2863.1,1750.98 2863.1,1681.19 v1(2864.17,1680.12)
  Bottom Layer w6: v1@2793.31,1539.37 2793.31,1608.27 2876.97,1691.93 R2587.1@2876.97,1743.11 2907.48,1743.11 R2580.1@2909.45,1745.08
CLE_0: R2582.1 R2598.1 U12.16 U31.D8 | length 1244.7
  Top Layer w6: U31.D8@2049.73,1580.09 2065.84,1563.98 v1(2065.95,1563.98) ; v1@2407.48,1574.8 2537.4,1574.8 2617.13,1495.08 v1(2812.01,1495.08) ; U12.16@2882.92,1750.98 2882.92,1714.52 2887.8,1709.65 v1(2913.39,1709.65)
  Bottom Layer w6: v1(2065.95,1563.98) 2065.95,1561.02 2081.85,1545.12 2229.17,1545.12 2267.72,1583.66 2399.61,1583.66 v1@2407.48,1575.79 ; v1(2812.01,1495.08) 2812.01,1592.52 2914.37,1694.88 v1@2914.37,1708.66 ; v1@2916.34,1709.65 R2598.1@2948.82,1742.13 ; R2598.1@2947.83,1743.11 2988.19,1743.11 R2582.1@2990.16,1745.08
  other v1: 2408.46,1577.76
CLK_0: R2340.1 U31.E7 | length 1162.3
  Top Layer w6: U31.E7@2018.08,1611.53 2034.14,1595.47 v1(2034.45,1595.47) ; v1(2456.69,1765.75) 2457.68,1764.76 2662.4,1764.76 2762.8,1865.16 3018.7,1865.16 R2340.1@3024.61,1871.06
  Bottom Layer w6: v1@2034.45,1592.52 v1(2034.45,1595.47) 2049.95,1579.98 2103.08,1579.98 2105.46,1577.6 2152.72,1577.6 2175.2,1555.12 2219.49,1555.12 2311.02,1646.65 2339.57,1646.65 v1@2455.71,1762.79
DATA1-5_0: R2479.2 U31.A20 | length 416.6
  Top Layer w6: U31.A20@2144.69,1201.77 2242.13,1104.33 2242.13,853.35 R2479.2@2222.44,833.66